# Altium PCB VECTOR_routed.PcbDoc (part 1 of 3)
Units mil, origin at the board's own origin, x right, y up, seen from the top; angles counter-clockwise.
Board outline 6000 x 4000 mil, 8 copper layers (Top Layer, Signal Layer 1, Signal Layer 2, Signal Layer 3, Signal Layer 4, VCC, Ground, Bottom Layer), stack 66.302 mil thick; 137 components, 274 nets, 1120 pads, 645 vias.
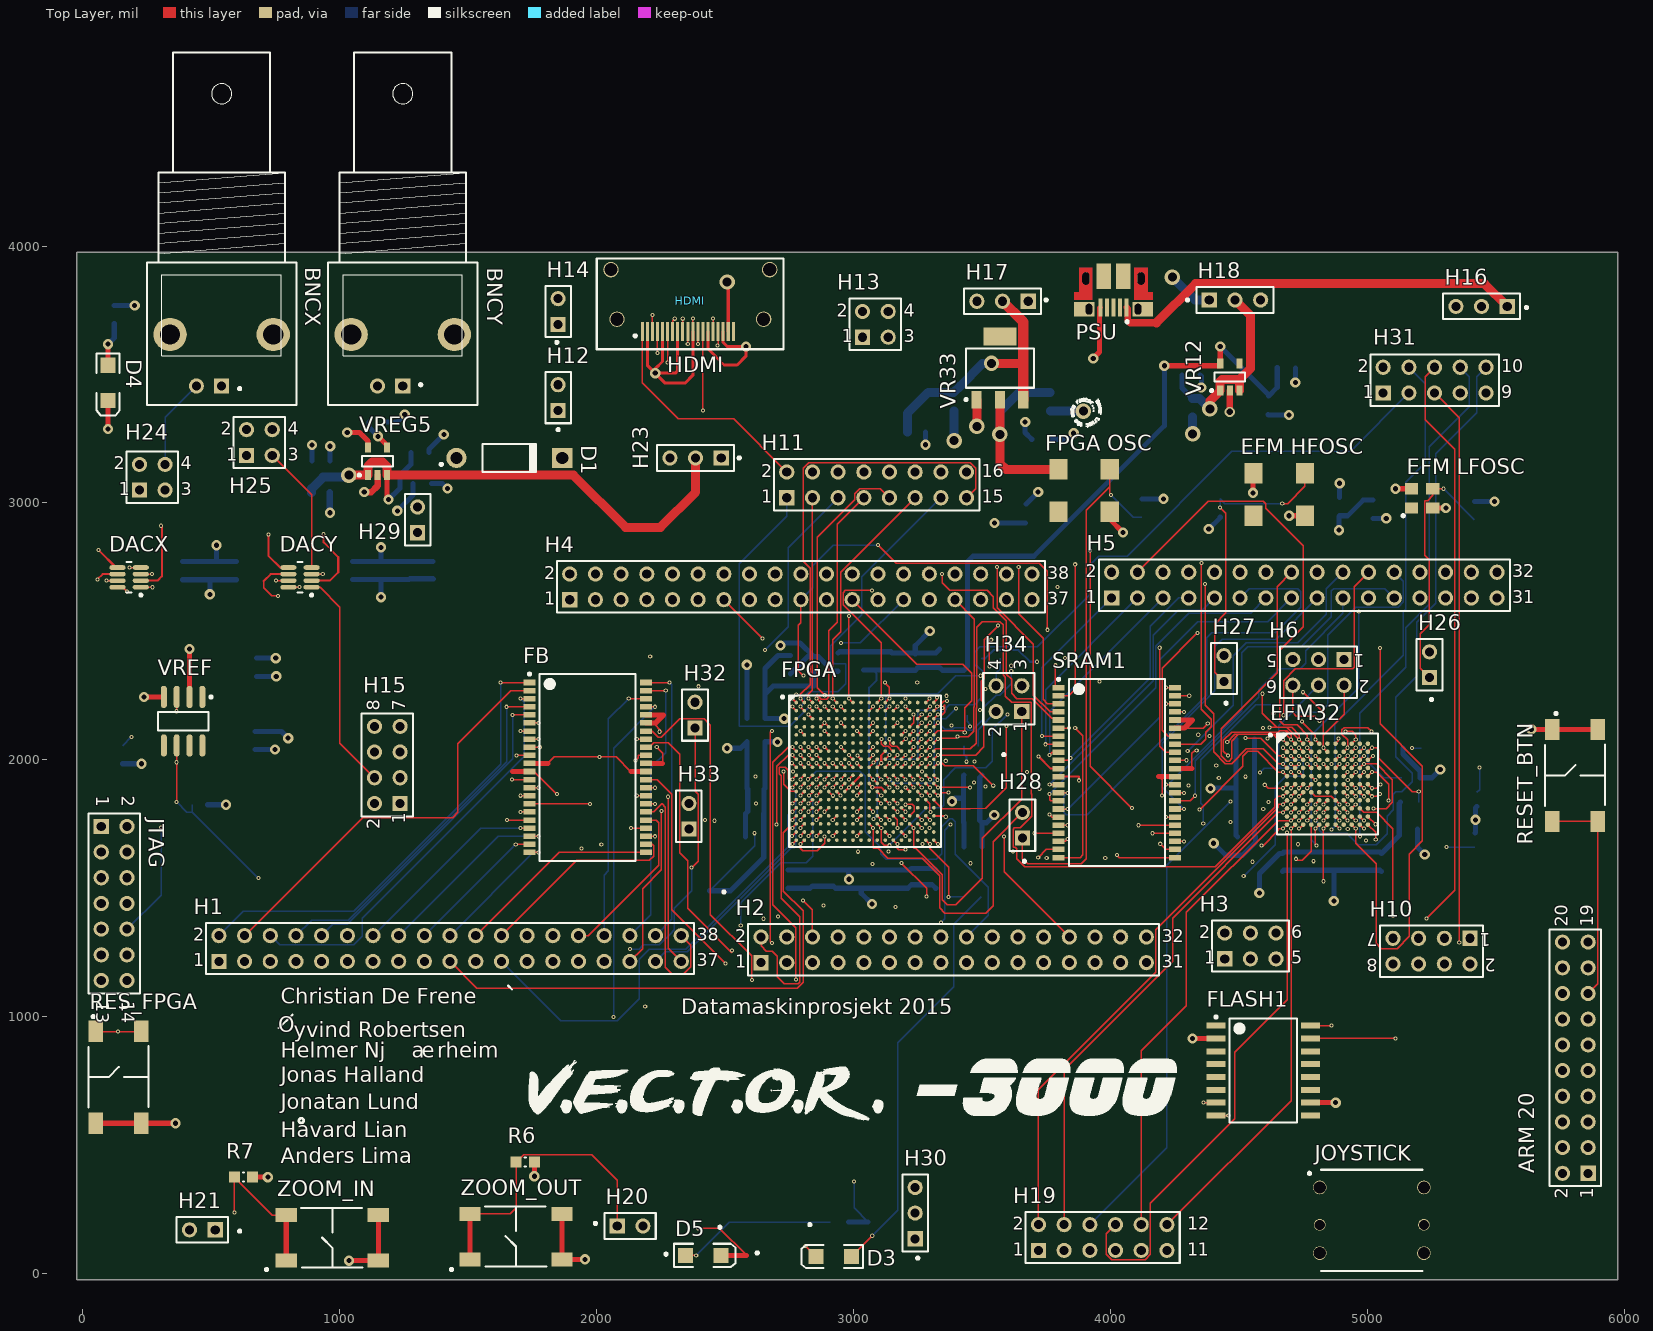
[diagram p0: Top Layer view]
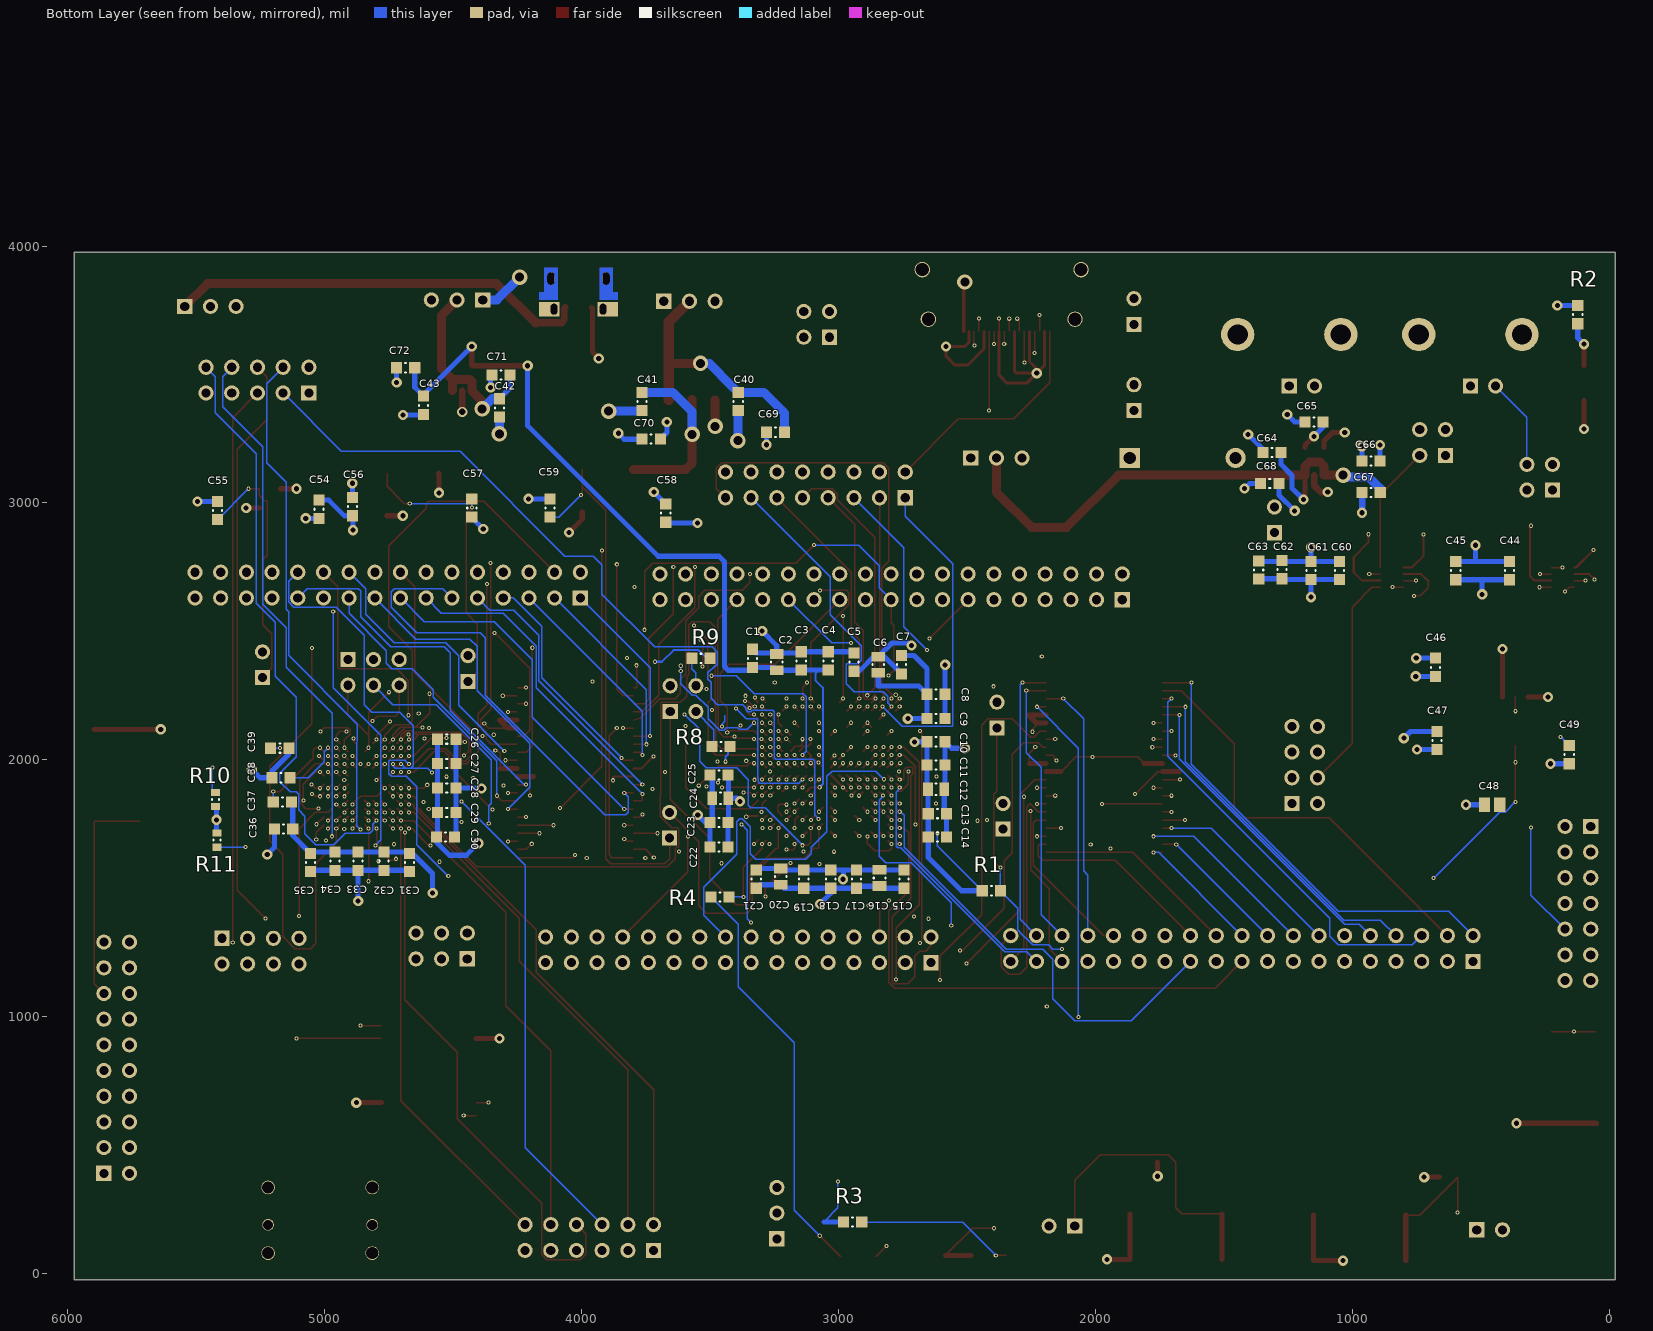
[diagram p1: Bottom Layer view, seen from below]
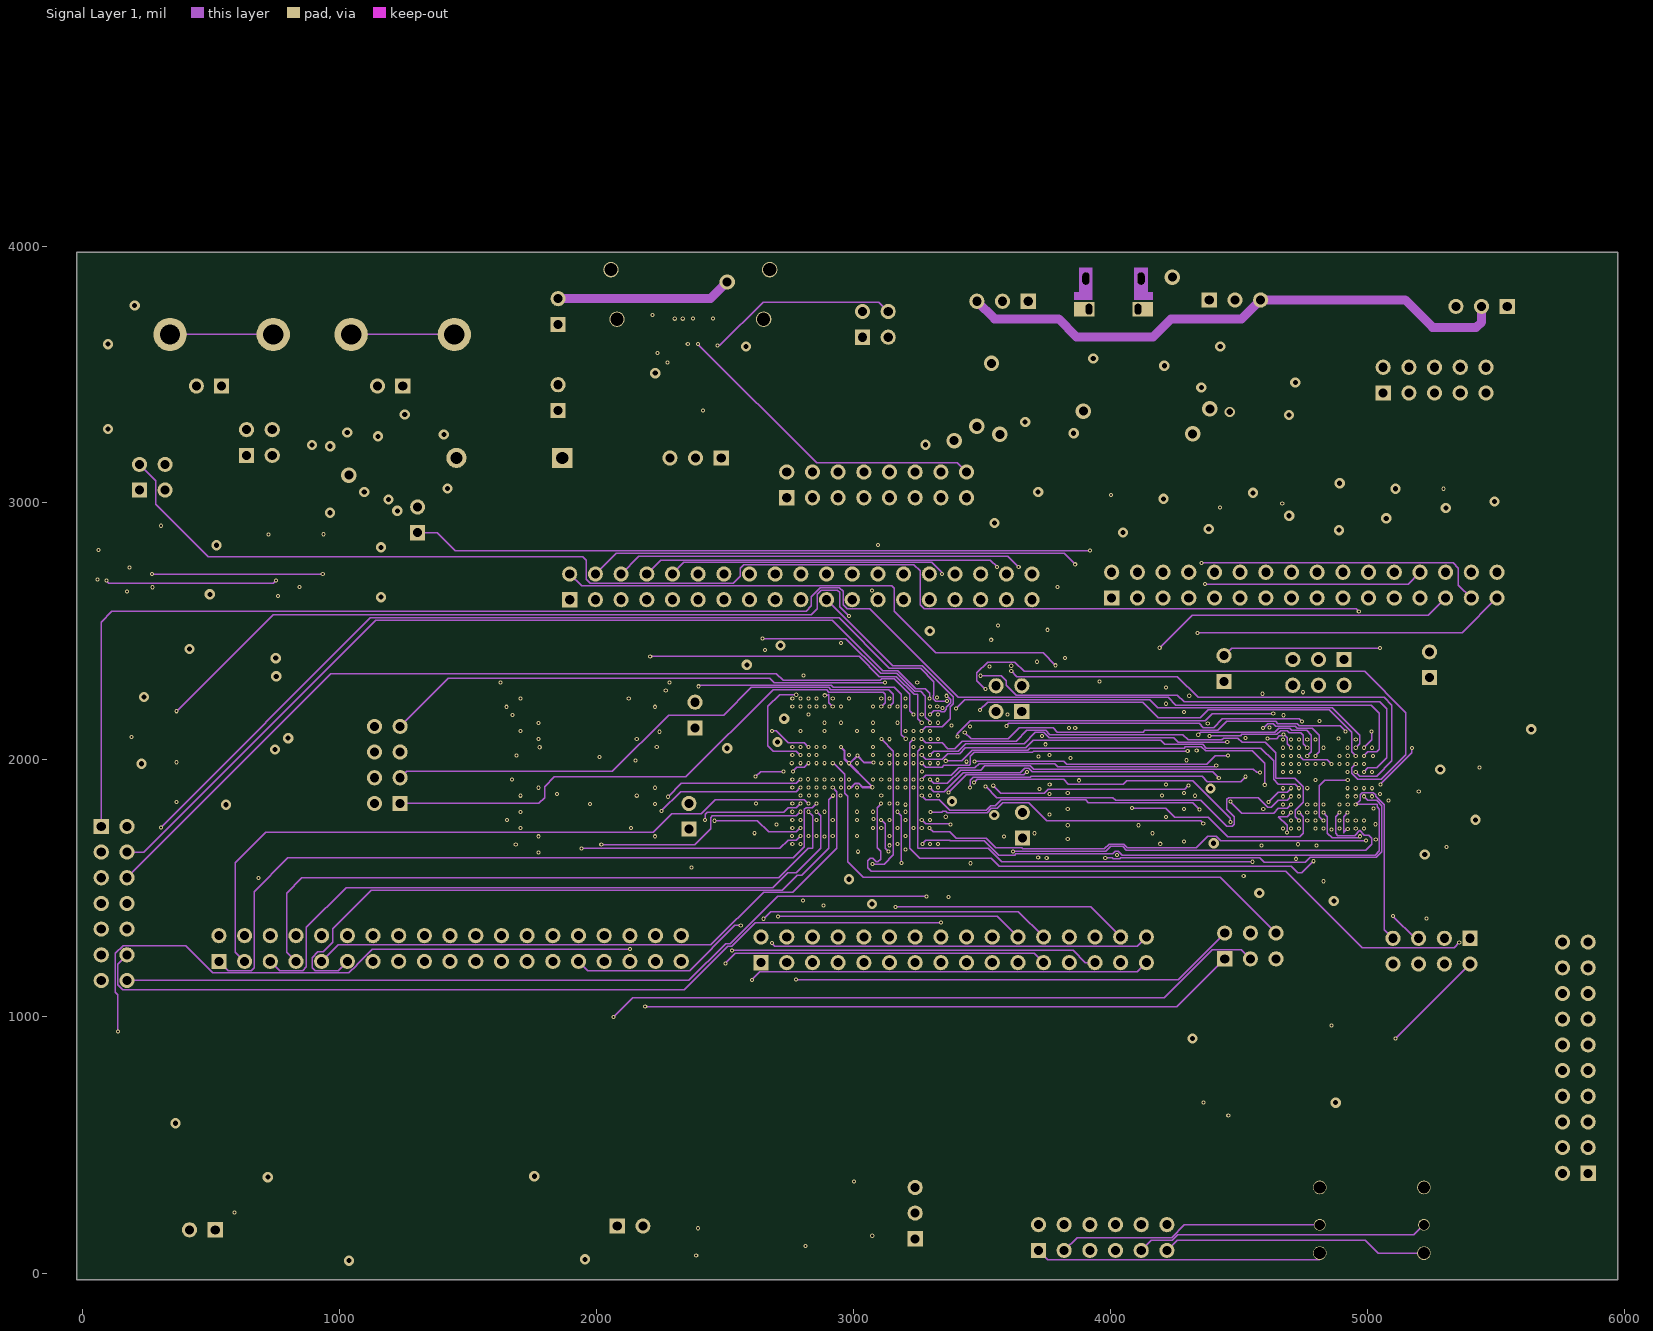
[diagram p2: Signal Layer 1]
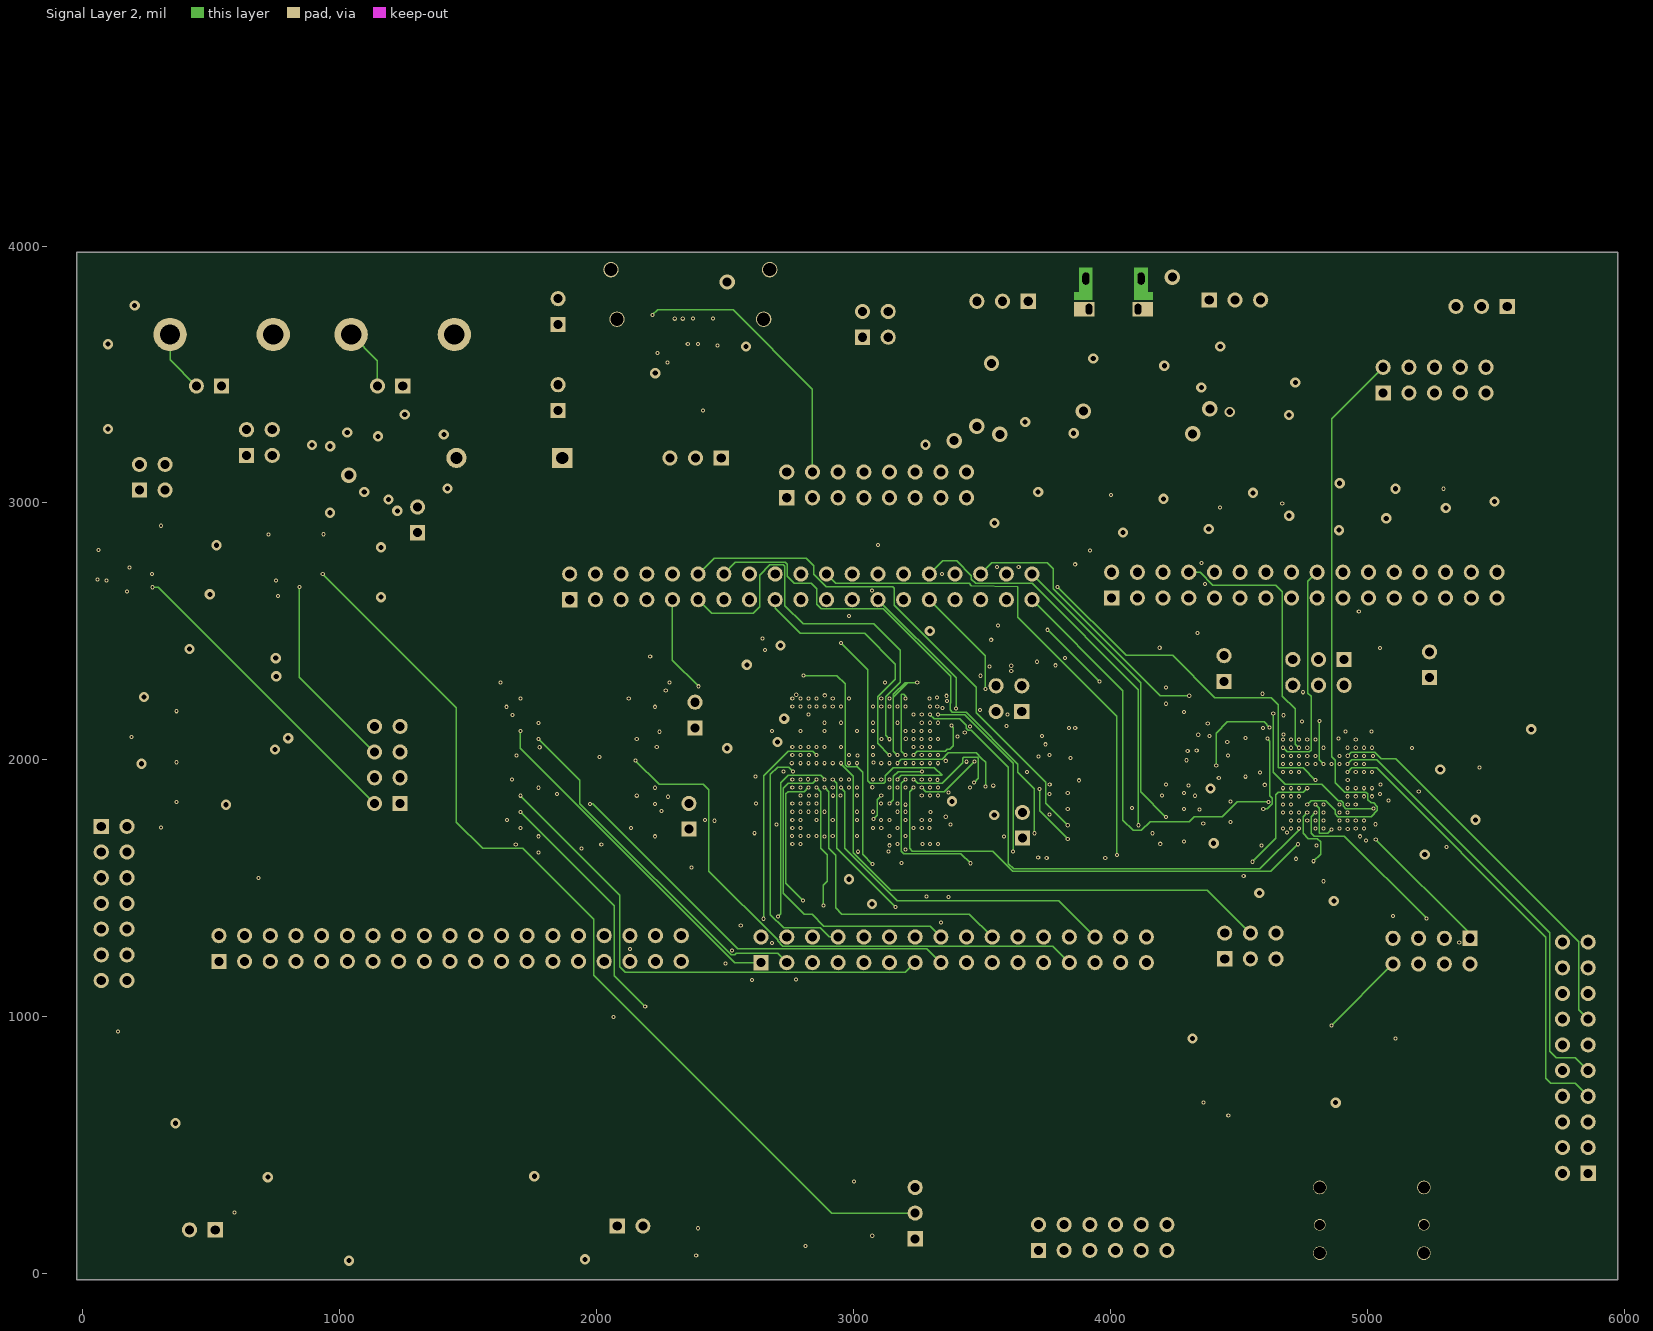
[diagram p3: Signal Layer 2]
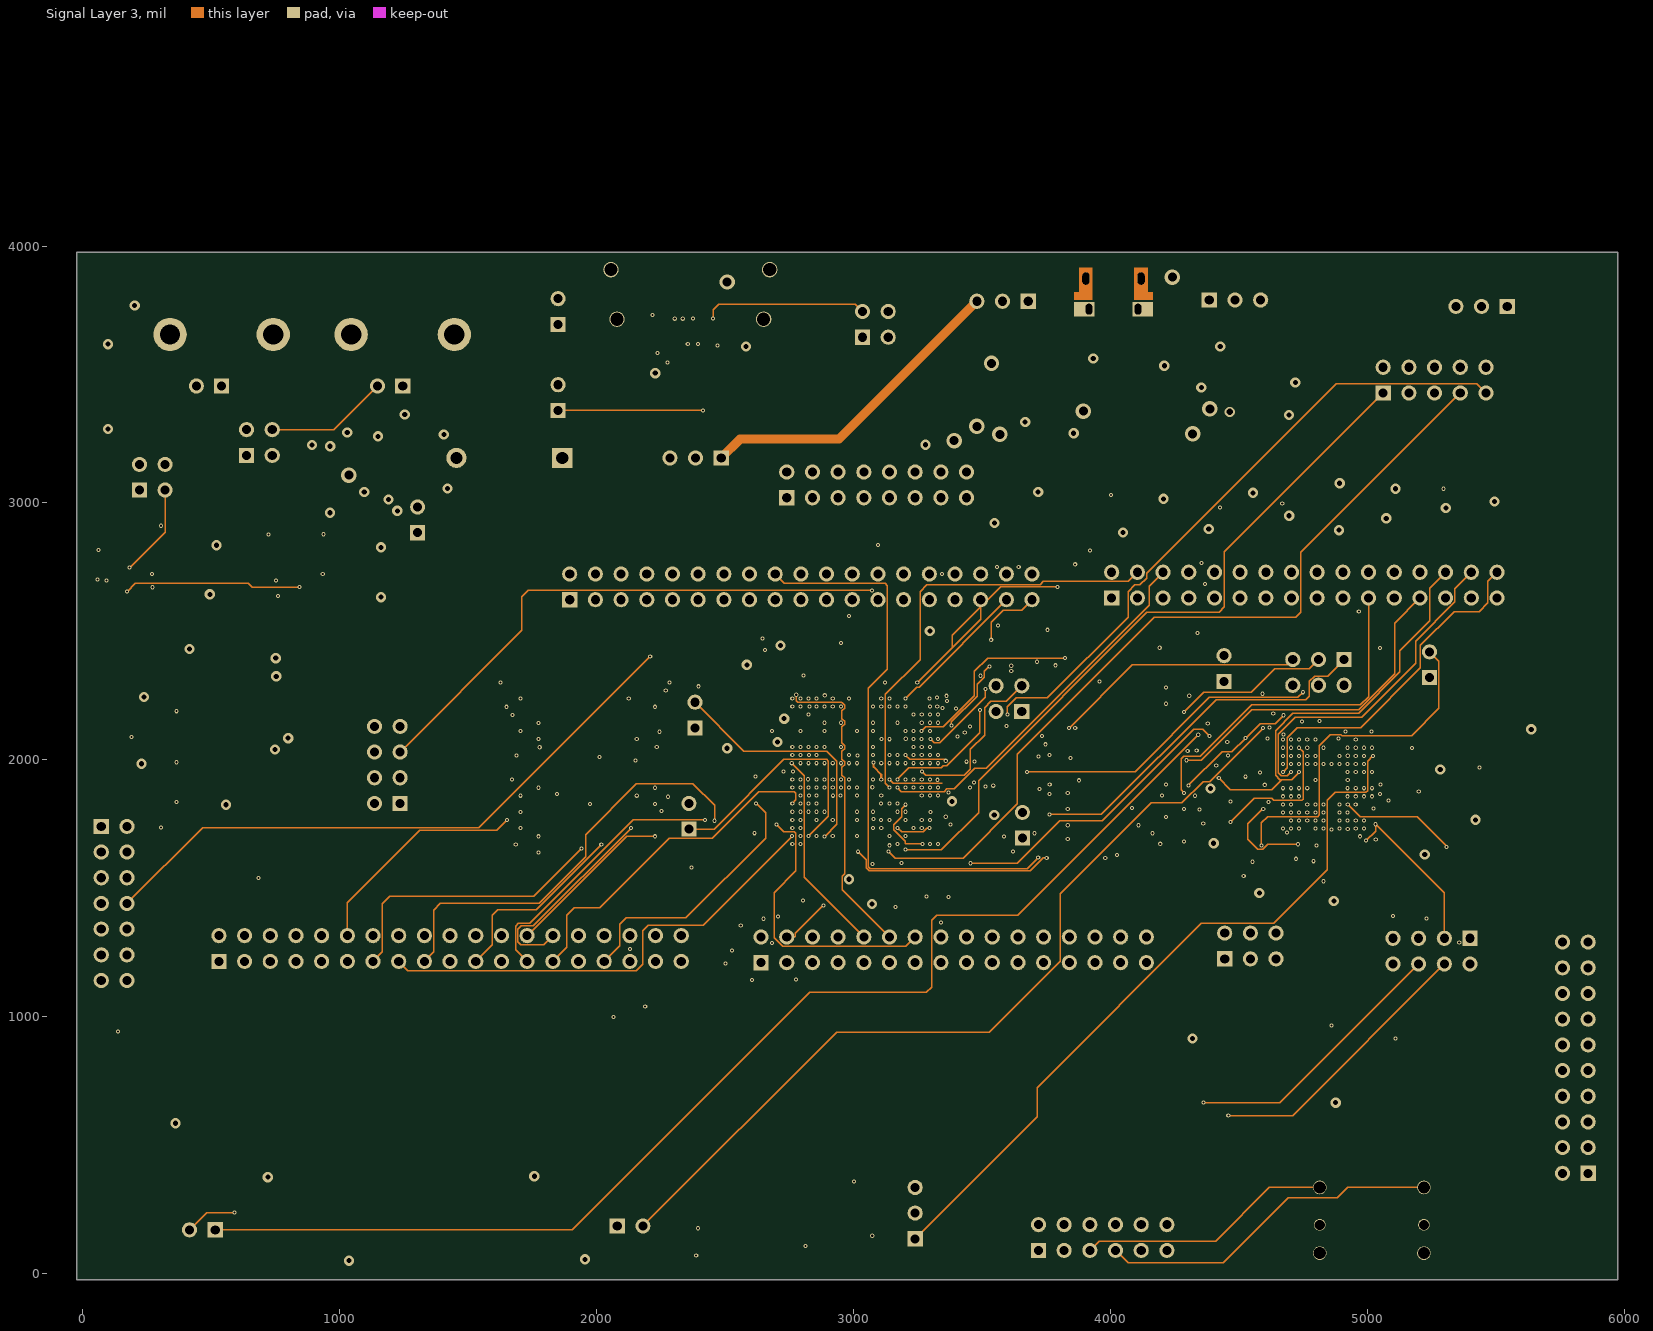
[diagram p4: Signal Layer 3]
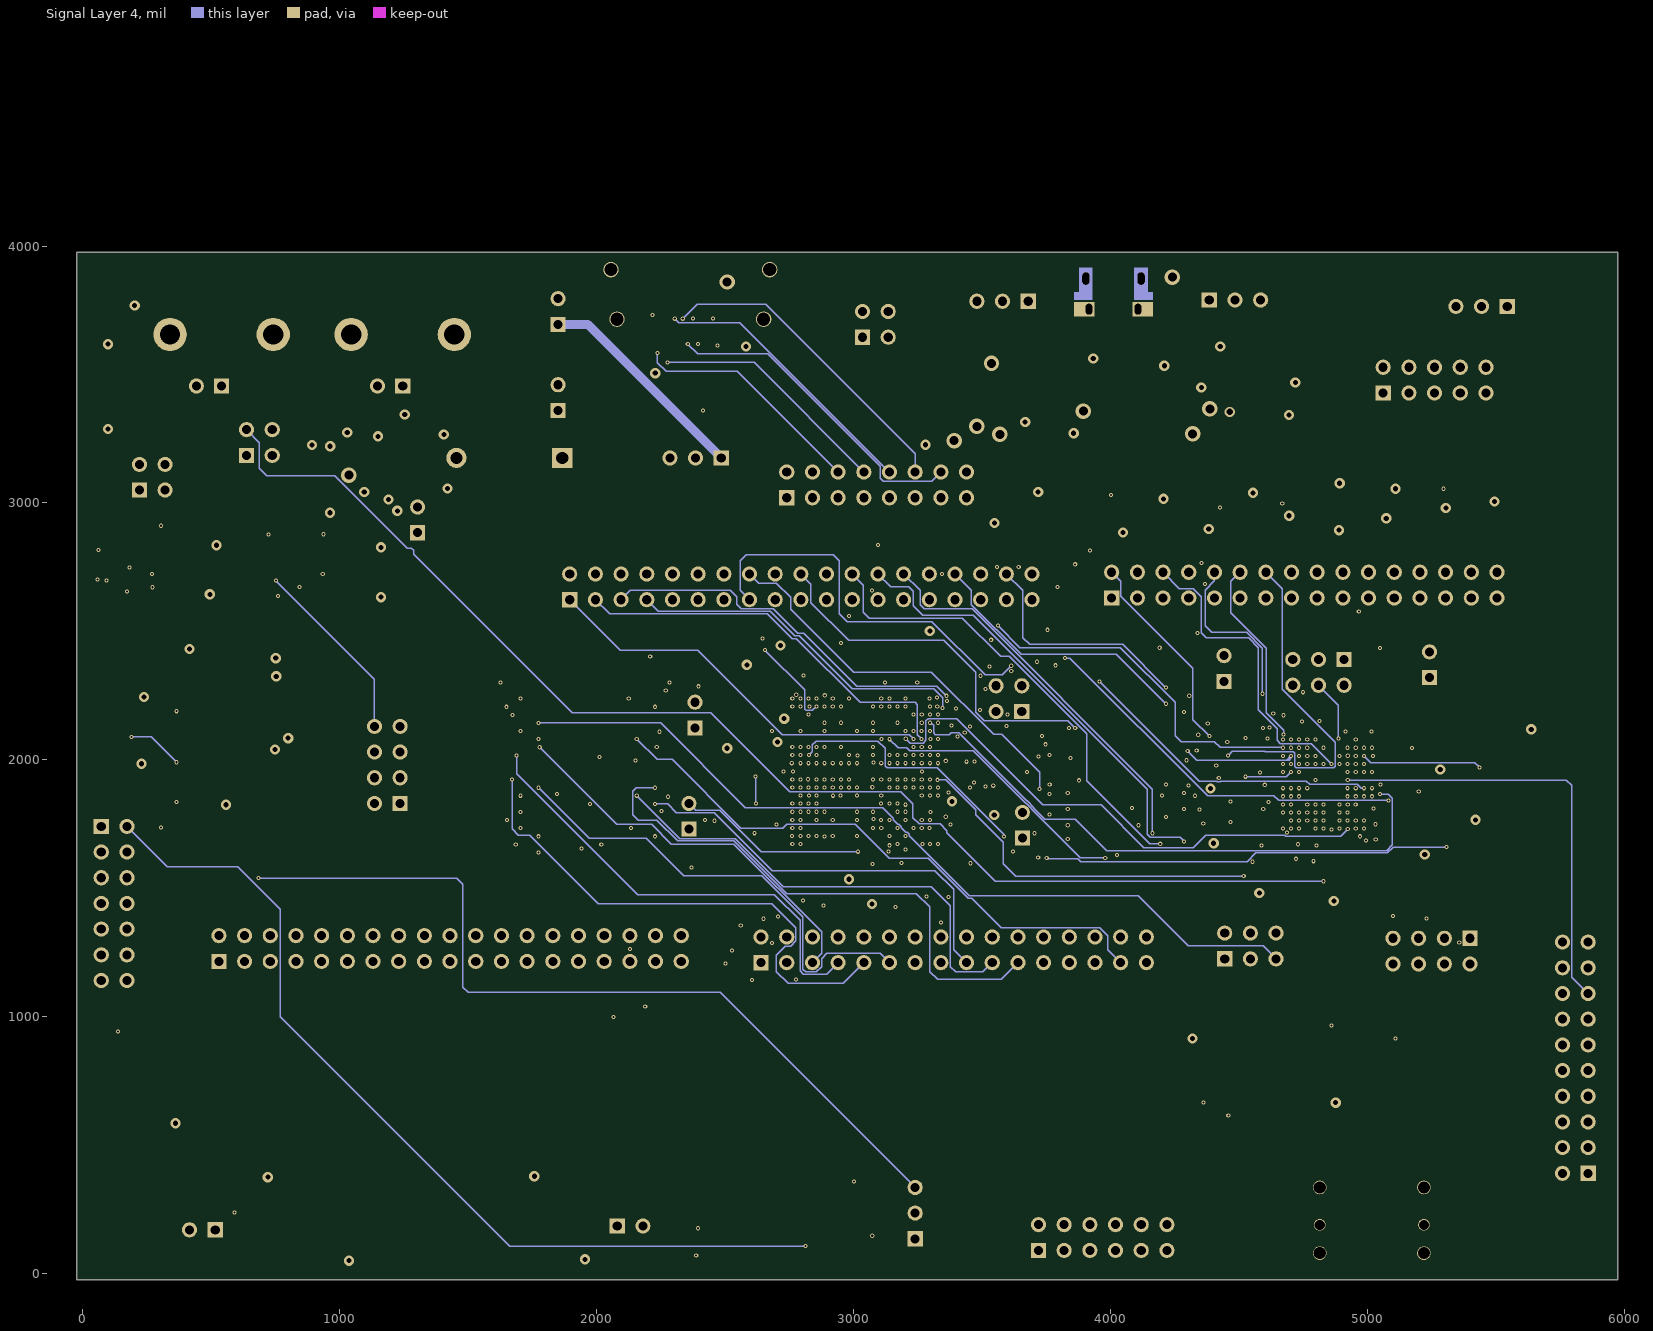
[diagram p5: Signal Layer 4]
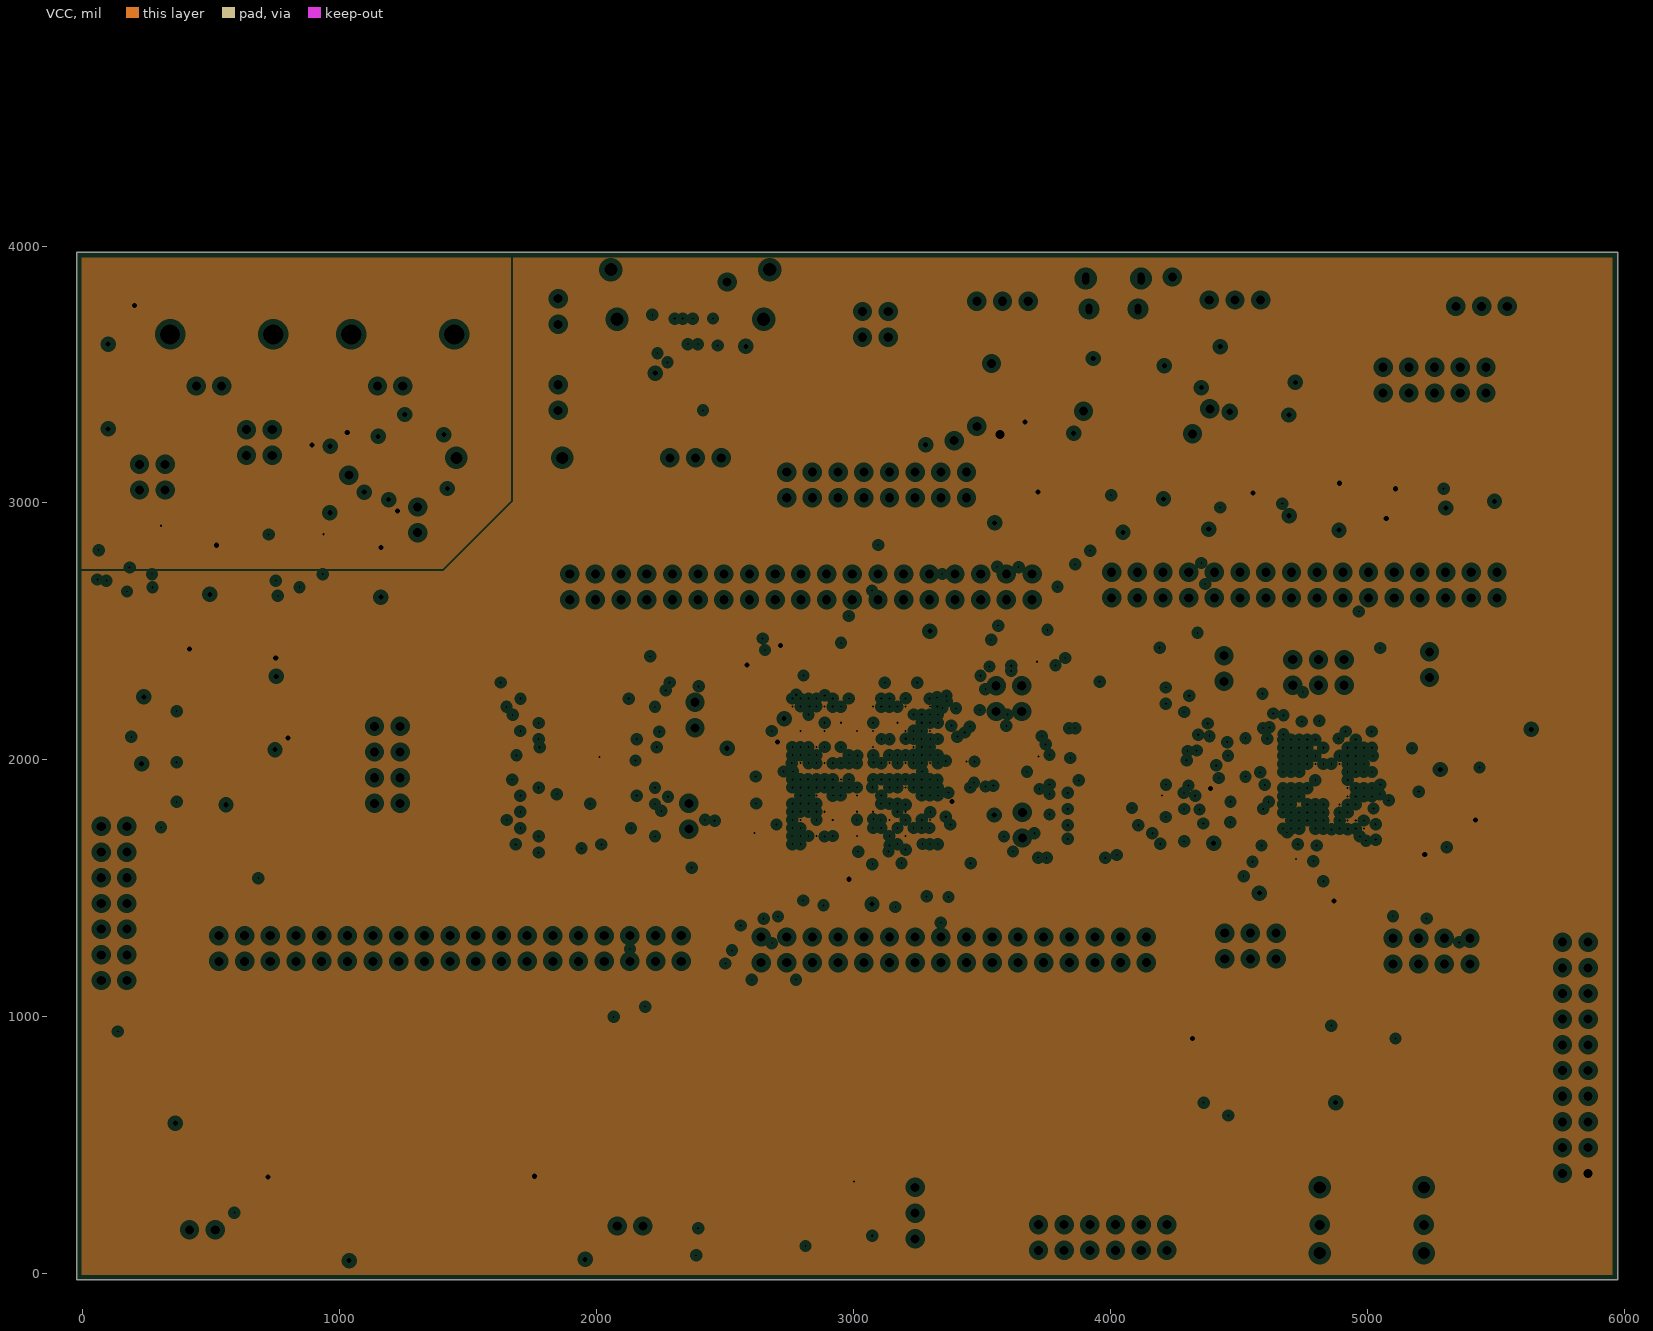
[diagram p6: VCC, clearances drawn from the general rule]
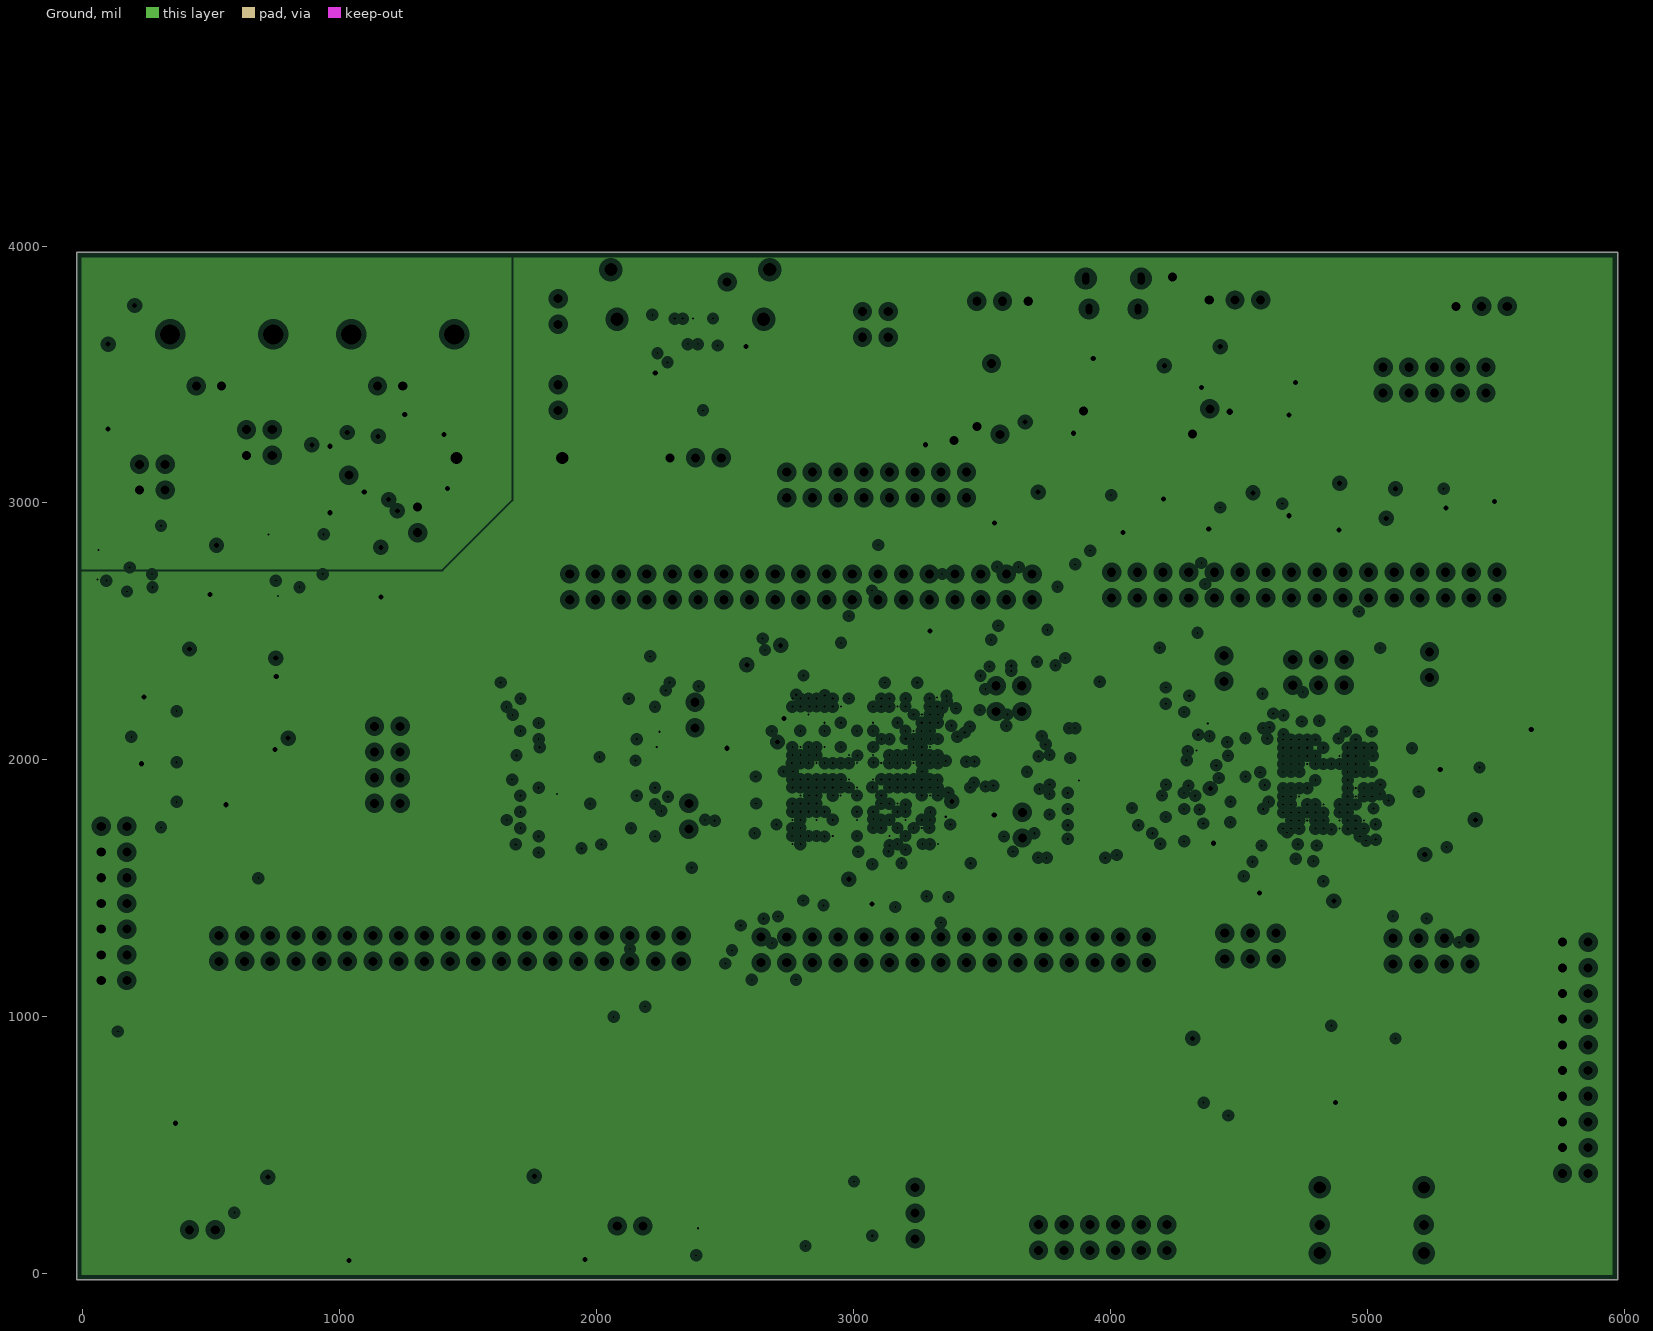
[diagram p7: Ground, clearances drawn from the general rule]

## Layer stack, top to bottom
Top Solder: solder mask 0.4, Solder Resist, Dk 3.5
Top Layer: signal copper 1.4
Dielectric 1: core 10, FR-4, Dk 4.2
Signal Layer 1: signal copper 1.417
Dielectric 5: prepreg 5, Dk 4.2
Signal Layer 2: signal copper 1.417
Dielectric 4: core 10, Dk 4.2
Signal Layer 3: signal copper 1.417
Dielectric 7: prepreg 5, Dk 4.2
Signal Layer 4: signal copper 1.417
Dielectric 8: core 10, Dk 4.2
VCC: plane copper 1.417, net (Multiple Nets)
Dielectric 3: prepreg 5, Dk 4.2
Ground: plane copper 1.417, net (Multiple Nets)
Dielectric 2: core 10, Dk 4.2
Bottom Layer: signal copper 1.4
Bottom Solder: solder mask 0.4, Solder Resist, Dk 3.5

## Board outline
-25,-25 5975,-25 5975,3975 2980,3975 -25,3975

## Design rules (kind name [scope] priority, off if disabled: settings)
Clearance [All] p1: gap=3.94
FanoutControl Fanout_BGA [(InComponentClass('EFM') OR InComponent('FPGA'))] p1: bgadir=Out bgaviamode=Centered fanoutstyle=Auto fanoutdirection=Alternating viagrid=1 // Fanout_BGA (Default Rule)
MinimumSolderMaskSliver [All] p1: minsoldermaskwidth=3.94
PlaneClearance [All] p1: clearance=20
PlaneConnect [All] p1: planeconnectstyle=Direct reliefexpansion=20 reliefentries=4 reliefconductorwidth=10 reliefairgap=10
PolygonConnect [All] p1: connectstyle=Relief reliefconductorwidth=10 reliefentries=4 polygonreliefangle="90 Angle" airgapwidth=10
RoutingVias [All] p1: holewidth=8 width=16 viastyle="Through Hole" minholewidth=6 minwidth=10 maxholewidth=100 maxwidth=100
SolderMaskExpansion [All] p1: expansion=5
Width Width_Power [InNetClass('Power')] p1: maxlimit=35 minlimit=8 preferedwidth=10
Width [All] p2: maxlimit=100 minlimit=5 preferedwidth=5
26 further rules are at their usual default settings.

## Classes and differential pairs
component class SRAM: H4 H5 H6 SRAM1
component class "Power Supply": C40 C41 C42 C43 C64 C65 C66 C67 C68 C69 C70 C71 C72 D4 D5 H16 H17 H18 H23 PSU R2 R3 VR12 VR33 VREG5
component class JoystickButtons: H19 H20 H21 JOYSTICK R6 R7 ZOOM_IN ZOOM_OUT
component class HDMI: H11 H12 H13 H14 HDMI
component class "Frame Buffer": FB H1 H2 H3
component class "FPGA Config": D3 H32 JTAG R1 R4 RES_FPGA
component class "FPGA Bank 0": FPGA
component class FPGA_VCC: C1 C2 C3 C4 C5 C6 C7 C8 C9 C10 C11 C12 C13 C14 C15 C16 C17 C18 C19 C20 C21 C22 C23 C24 C25
component class Flash: FLASH1 H10
component class EFM: "ARM 20" C39 EFM32 H29 R10 R11 RESET_BTN
component class "EFM Power": C26 C27 C28 C29 C30 C31 C32 C33 C34 C35 C36 C37 C38
component class DAC: BNCX BNCY C44 C45 C46 C47 C48 C49 C60 C61 C62 C63 D1 DACX DACY H15 H24 H25 H30 VREF
component class Clocks: C54 C55 C56 C57 C58 C59 "EFM HFOSC" "EFM LFOSC" "FPGA OSC" H26 H27 H28
net class EBI.A[0..22]: EBI.A0 EBI.A1 EBI.A2 EBI.A3 EBI.A4 EBI.A5 EBI.A6 EBI.A7 EBI.A8 EBI.A9 EBI.A10 EBI.A11 EBI.A12 EBI.A13 EBI.A14 EBI.A15 EBI.A16 EBI.A17 EBI.A18 EBI.A19 EBI.A20 EBI.A21 EBI.A22
net class EBI.D[0..15]: EBI.D0 EBI.D1 EBI.D2 EBI.D3 EBI.D4 EBI.D5 EBI.D6 EBI.D7 EBI.D8 EBI.D9 EBI.D10 EBI.D11 EBI.D12 EBI.D13 EBI.D14 EBI.D15
net class FB.A[0..18]: FB.A0 FB.A1 FB.A2 FB.A3 FB.A4 FB.A5 FB.A6 FB.A7 FB.A8 FB.A9 FB.A10 FB.A11 FB.A12 FB.A13 FB.A14 FB.A15 FB.A16 FB.A17 FB.A18
net class FB.D[0..15]: FB.D0 FB.D1 FB.D2 FB.D3 FB.D4 FB.D5 FB.D6 FB.D7 FB.D8 FB.D9 FB.D10 FB.D11 FB.D12 FB.D13 FB.D14 FB.D15
component class "FPGA Bank 2": H31 H33 H34 R8 R9

## Components (designator, comment, footprint, x,y, rotation, side; value= is the part's Value field where it differs from the comment)
"ARM 20" "ARM 20 Pin Header" HDR2X10 5860,390 r90 top
BNCX "BNC" "BNC_RA CON" 540,3455 r270 top
BNCY "BNC" "BNC_RA CON" 1245,3455 r270 top
C1 "4.7uF" CAPC0603(1608)100_M 3335,2395 r270 bottom
C2 "100uF" CAPC0805(2012)75_L 3240,2380 r270 bottom
C3 "470nF" CAPC0603(1608)100_M 3145,2385 r270 bottom
C4 "470nF" CAPC0603(1608)100_M 3040,2385 r270 bottom
C5 "4.7uF" CAPC0603(1608)100_M 2940,2380 r270 bottom
C6 "100uF" CAPC0805(2012)75_L 2845,2370 r90 bottom
C7 "470nF" CAPC0603(1608)100_M 2755,2370 r270 bottom
C8 "470nF" CAPC0603(1608)100_M 2620,2255 r180 bottom
C9 "470nF" CAPC0603(1608)100_M 2620,2160 r180 bottom
C10 "470nF" CAPC0603(1608)100_M 2620,2070 r0 bottom
C11 "470nF" CAPC0603(1608)100_M 2620,1980 r0 bottom
C12 "100uF" CAPC0805(2012)75_L 2620,1885 r0 bottom
C13 "4.7uF" CAPC0603(1608)100_M 2615,1790 r0 bottom
C14 "470nF" CAPC0603(1608)100_M 2615,1700 r0 bottom
C15 "470nF" CAPC0603(1608)100_M 2745,1535 r90 bottom
C16 "100uF" CAPC0805(2012)75_L 2840,1540 r90 bottom
C17 "4.7uF" CAPC0603(1608)100_M 2930,1535 r90 bottom
C18 "470nF" CAPC0603(1608)100_M 3030,1535 r90 bottom
C19 "470nF" CAPC0603(1608)100_M 3135,1535 r90 bottom
C20 "100uF" CAPC0805(2012)75_L 3225,1545 r90 bottom
C21 "4.7uF" CAPC0603(1608)100_M 3320,1535 r90 bottom
C22 "470nF" CAPC0603(1608)100_M 3465,1660 r180 bottom
C23 "470nF" CAPC0603(1608)100_M 3465,1755 r180 bottom
C24 "100uF" CAPC0805(2012)75_L 3460,1850 r180 bottom
C25 "4.7uF" CAPC0603(1608)100_M 3465,1940 r180 bottom
C26 "100nF" CAPC0603(1608)100_M 4525,2080 r180 bottom
C27 "100nF" CAPC0603(1608)100_M 4525,1985 r180 bottom
C28 "100nF" CAPC0603(1608)100_M 4525,1890 r180 bottom
C29 "100nF" CAPC0603(1608)100_M 4525,1795 r180 bottom
C30 "100nF" CAPC0603(1608)100_M 4530,1700 r180 bottom
C31 "100nF" CAPC0603(1608)100_M 4670,1600 r270 bottom
C32 "100nF" CAPC0603(1608)100_M 4770,1605 r90 bottom
C33 "10uF" CAPC0603(1608)100_M 4870,1605 r90 bottom
C34 "100nF" CAPC0603(1608)100_M 4960,1605 r90 bottom
C35 "100nF" CAPC0603(1608)100_M 5055,1600 r90 bottom
C36 "100nF" CAPC0603(1608)100_M 5160,1730 r180 bottom
C37 "1uF" CAPC0603(1608)100_M 5165,1835 r180 bottom
C38 "4.7uF" CAPC0603(1608)100_M 5170,1930 r180 bottom
C39 "1uF" CAPC0603(1608)100_M 5175,2045 r180 bottom
C40 "1uF" CAPC0603(1608)100_M 3390,3395 r90 bottom
C41 "1uF" CAPC0603(1608)100_M 3765,3395 r90 bottom
C42 "1uF" CAPC0603(1608)100_M 4320,3370 r90 bottom
C43 "1uF" CAPC0603(1608)100_M 4615,3380 r90 bottom
C44 "1uF" CAPC0603(1608)100_M 387,2736 r270 bottom
C45 "1uF" CAPC0603(1608)100_M 597,2736 r270 bottom
C46 "10uF" CAPC0603(1608)100_M 675,2360 r90 bottom
C47 "100nF" CAPC0603(1608)100_M 670,2075 r90 bottom
C48 "1uF" C0805 455,1825 r0 bottom
C49 "100nF" CAPC0603(1608)100_M 155,2020 r90 bottom
C54 "10nF" CAPC0603(1608)100_M 5022.42,2975.16 r270 bottom
C55 "15pF" CAPC0603(1608)100_M 5417.42,2970.16 r270 bottom
C56 "10nF" CAPC0603(1608)100_M 4892.42,2985.16 r90 bottom
C57 "15pF" CAPC0603(1608)100_M 4427.42,2980.16 r90 bottom
C58 "10nF" CAPC0603(1608)100_M 3672.42,2960.16 r90 bottom
C59 "15pF" CAPC0603(1608)100_M 4122.42,2980.16 r270 bottom
C60 "100nF" CAPC0603(1608)100_M 1049,2737 r90 bottom
C61 "10pF" CAPC0603(1608)100_M 1160,2737 r90 bottom
C62 "100nF" CAPC0603(1608)100_M 1273,2740 r270 bottom
C63 "10pF" CAPC0603(1608)100_M 1364,2739 r270 bottom
C64 "1uF" CAPC0603(1608)100_M 1312,3196 r180 bottom
C65 "4.7uF" CAPC0603(1608)100_M 1149,3315 r180 bottom
C66 "4.7uF" CAPC0603(1608)100_M 927,3163 r180 bottom
C67 "100nF" CAPC0603(1608)100_M 926,3041 r180 bottom
C68 "100nF" CAPC0603(1608)100_M 1321,3076 r180 bottom
C69 "100nF" CAPC0603(1608)100_M 3245,3275 r180 bottom
C70 "100nF" CAPC0603(1608)100_M 3729,3248 r180 bottom
C71 "100nF" CAPC0603(1608)100_M 4314,3498 r180 bottom
C72 "100nF" CAPC0603(1608)100_M 4685,3526 r180 bottom
D1 "Diode 1N4001" DO-41 1660,3175 r0 top
D3 "LED2" 3.2X1.6X1.1 2923,66 r180 top
D4 "LED2" 3.2X1.6X1.1 98,3467 r270 top
D5 "LED2" 3.2X1.6X1.1 2415.16,70.47 r0 top
DACX "AD5061BRJZ-1500RL7" RJ-8_N 180,2710 r180 top
DACY "AD5061BRJZ-1500RL7" RJ-8_N 845,2710 r180 top
EFM32 "EFM32GG990F1024-BGA112" ENMR-BGA112 4845,1905 r0 top
"EFM HFOSC" "FXO-HC736R-48" FPGA-OSC 4522.42,2910.16 r90 top
"EFM LFOSC" "F32K-327" LFOSC-32 5172.42,2980.16 r90 top
FB "CY7C1051DV33-10ZSXI" TSOP-44-SRAM 1965,1970 r0 top
FLASH1 "S25FL129P0XMFI001" SOIC-16-FLASH 4595,790 r0 top
FPGA "XC6SLX45-2CSG324I" CSG324 3045,1955 r0 top
"FPGA OSC" "FXO-HC736R-100" FPGA-OSC 3762.42,2925.16 r90 top
H1 "FB_ADDRESS_HEADER" HDR2X19 529.33,1215.16 r0 top
H2 "FB_DATA_HEADER" HDR2X16 2640,1210 r0 top
H3 "FB_CONTROL_HEADER" HDR2X3 4445,1225 r0 top
H4 "SRAM1_ADDRESS_HEADER" HDR2X19 1895.08,2623.03 r0 top
H5 "SRAM1_DATA_HEADER" HDR2X16 4005,2630 r0 top
H6 "SRAM1_CONTROL_HEADER" HDR2X3 4910,2390 r180 top
H10 "Header 4X2" HDR2X4 5400,1305 r180 top
H11 "HDMI_HEADER" HDR2X8 2740,3020 r0 top
H12 "CEC_HEADER" HDR1X2 1850,3360 r90 top
H13 "DDC_HEADER" HDR2X2 3035,3645 r0 top
H14 "POWER_HEADER" HDR1X2 1850,3695 r90 top
H15 "DAC_HEADER" HDR2X4 1235,1830 r90 top
H16 "5V_HEADER" HDR1X3 5545,3765 r180 top
H17 "3.3V_HEADER" HDR1X3 3680,3785 r180 top
H18 "1.2V_HEADER" HDR1X3 4385,3790 r0 top
H19 "JOYSTICK_HEADER" HDR2X6 3720,90 r0 top
H20 "ZOOM_OUT_HEADER" HDR1X2 2080,185 r0 top
H21 "ZOOM_IN_HEADER" HDR1X2 515,170 r180 top
H23 "5V_DAC_HEADER" HDR1X3 2485,3175 r180 top
H24 "Header 2X2" HDR2X2 220,3050 r0 top
H25 "Header 2X2" HDR2X2 637,3185 r0 top
H26 "Header 2" HDR1X2 5242.42,2320.16 r90 top
H27 "Header 2" HDR1X2 4442.42,2305.16 r90 top
H28 "Header 2" HDR1X2 3657.42,1695.16 r90 top
H29 "Header 2" HDR1X2 1303,2884 r90 top
H30 "Header 3" HDR1X3 3240,135 r90 top
H31 "Header 5X2" HDR2X5 5062,3428 r0 top
H32 "Header 2" HDR1X2 2383,2124 r90 top
H33 "Header 2" HDR1X2 2359,1730 r90 top
H34 "Header 2X2" HDR2X2 3655,2188 r90 top
HDMI "HDMI_connector" HDMI-type-A 2650,3715 r180 top
JOYSTICK "SKQUCAA010" 5-WAY-JOYSTICK 4815,335 r0 top
JTAG "Header 7X2" HDR2X7 71.26,1740.55 r270 top
PSU "MICRO-USB_CONNECTOR" MICRO-USB 4012,3761 r180 top
R1 "4.7kOhm" RESC0603(1608)_M 2405,1490 r0 bottom
R2 "39Ohm" RESC0603(1608)_M 122,3733 r90 bottom
R3 "18 Ohm" RESC0603(1608)_M 2945,200 r0 bottom
R4 "68 Ohm" RESC0603(1608)_M 3461,1466 r180 bottom
R6 "10 kOhm" RESC0603(1608)_M 1722,434 r0 top
R7 "10 kOhm" RESC0603(1608)_M 625,375 r0 top
R8 "10 kOhm" RESC0603(1608)_M 3457,2052 r180 bottom
R9 "10 kOhm" RESC0603(1608)_M 3535,2395 r180 bottom
R10 "330 Ohm" RESC0603(1608)_L 5426,1845 r90 bottom
R11 "4.7 kOhm" RESC0603(1608)_L 5419,1687 r90 bottom
RES_FPGA "FSM2JSMA" Button 50,585 r0 top
RESET_BTN "FSM2JSMA" Button 5720,1760 r0 top
SRAM1 "CY7C1051DV33-10ZSXI" TSOP-44-SRAM 4025,1950 r0 top
VR12 "ADP170AUJZ-1.2-r7" VREG-1.2 4465,3490 r90 top
VR33 "ADP3339AKCZ-3.3-r7" VREG-3.3 3570,3525 r90 top
VREF "REF195GSZ-REEL7" ADI-R-8_N 390,2150 r270 top
VREG5 "LP2992AIM5-5.0/NOPB" VREG-5 1147,3162 r90 top
ZOOM_IN "FSM2JSMA" Button 1150,50 r90 top
ZOOM_OUT "FSM2JSMA" Button 1865,55 r90 top

## Footprints (in the part's own frame and the unit in brackets; to place one, negate y for a bottom-side part, rotate by r counter-clockwise, add the part's x,y. Pads: shape width x height; smd on the part's side, far side on the other; paste and mask are expansions set on the pad)
3.2X1.6X1.1 [mm] "SMT LED; 2 Flat Leads"
  rect 1.5x1.5 smd: 1(-1.75,0) 2(1.75,0)
  silkscreen extent -2.9,-1.15 3.2,1.15
5-WAY-JOYSTICK [mm]
  oval 1.34x1.35 hole 1.2: 1(0,0) 3(0,-6.5) 4(10.3,-6.5) 6(10.3,0)
  round 1.15 hole 1: 2(0,-3.7) 5(10.3,-3.7)
  silkscreen extent 0.15,-8.25 10.15,1.75
ADI-R-8_N [mm] "SOIC, 8-Leads, Body 4.9x3.9mm, Pitch 1.27mm, IPC Medium Density"
  oval 2.2x0.6 smd: 1(-2.4,1.905) 2(-2.4,0.635) 3(-2.4,-0.635) 4(-2.4,-1.905) 5(2.4,-1.905) 6(2.4,-0.635) 7(2.4,0.635) 8(2.4,1.905)
  silkscreen extent -2.52,-2.5 0.9,2.88, body extent -2,-2.5 2,2.5, height 1.75
"BNC_RA CON" [mm] "Connector; BNC Elbow"
  rect 1.5x1.5 hole 0.9: 1(0,0)
  round 3.3 hole 2: 2(-5.1,5.1) 2(-5.1,-5.1)
  round 1.5 hole 0.9: 2(0,-2.5)
  silkscreen extent -33,-7.4 1.9,7.4
Button [mm] "copied from 256 SoG"
  rect 1.4x2.1 smd: 1(0,9.1) 2(0,0) 3(4.5,9.1) 4(4.5,0)
  silkscreen extent -0.7,1.55 5.21,7.62
C0805 [mm] "Chip Capacitor, Body 2.0x1.3mm, IPC High Density"
  rect 1.1x1.4 smd: 1(-0.75,0) 2(0.75,0)
  body extent -1.1,-0.72 1.1,0.72, height 1.4
CAPC0603(1608)100_M [mm] "Chip Capacitor, Body 1.6x0.8mm, Height 1.0mm, IPC Low Density"
  rect 1.1x1.1 smd: 1(-0.9,0) 2(0.9,0)
  silkscreen extent -0.05,-0.45 0.05,0.45, body extent -0.87,-0.47 0.88,0.48, height 1
CAPC0805(2012)75_L [mm] "Chip Capacitor, Body 2.0x1.2mm, Height 0.75mm, IPC High Density"
  rect 0.95x1.35 smd: 1(-0.8,0) 2(0.8,0)
  silkscreen extent -0.05,-0.58 0.05,0.58, body extent -1.1,-0.72 1.1,0.72, height 0.75
CSG324 [mm] "BGA, 324-Leads, Body 15x15mm, Pitch 0.8mm"
  round 0.36 smd: A1(-6.8,6.8) A2(-6,6.8) A3(-5.2,6.8) A4(-4.4,6.8) A5(-3.6,6.8) A6(-2.8,6.8) A7(-2,6.8) A8(-1.2,6.8) A9(-0.4,6.8) A10(0.4,6.8) A11(1.2,6.8) A12(2,6.8) A13(2.8,6.8) A14(3.6,6.8) A15(4.4,6.8) A16(5.2,6.8) A17(6,6.8) A18(6.8,6.8) B1(-6.8,6) B2(-6,6) B3(-5.2,6) B4(-4.4,6) B5(-3.6,6) B6(-2.8,6) B7(-2,6) B8(-1.2,6) B9(-0.4,6) B10(0.4,6) B11(1.2,6) B12(2,6) B13(2.8,6) B14(3.6,6) B15(4.4,6) B16(5.2,6) B17(6,6) B18(6.8,6) C1(-6.8,5.2) C2(-6,5.2) C3(-5.2,5.2) C4(-4.4,5.2) C5(-3.6,5.2) C6(-2.8,5.2) C7(-2,5.2) C8(-1.2,5.2) C9(-0.4,5.2) C10(0.4,5.2) C11(1.2,5.2) C12(2,5.2) C13(2.8,5.2) C14(3.6,5.2) C15(4.4,5.2) C16(5.2,5.2) C17(6,5.2) C18(6.8,5.2) D1(-6.8,4.4) D2(-6,4.4) D3(-5.2,4.4) D4(-4.4,4.4) D5(-3.6,4.4) D6(-2.8,4.4) D7(-2,4.4) D8(-1.2,4.4) D9(-0.4,4.4) D10(0.4,4.4) D11(1.2,4.4) D12(2,4.4) D13(2.8,4.4) D14(3.6,4.4) D15(4.4,4.4) D16(5.2,4.4) D17(6,4.4) D18(6.8,4.4) E1(-6.8,3.6) E2(-6,3.6) E3(-5.2,3.6) E4(-4.4,3.6) E5(-3.6,3.6) E6(-2.8,3.6) E7(-2,3.6) E8(-1.2,3.6) E9(-0.4,3.6) E10(0.4,3.6) E11(1.2,3.6) E12(2,3.6) E13(2.8,3.6) E14(3.6,3.6) E15(4.4,3.6) E16(5.2,3.6) E17(6,3.6) E18(6.8,3.6) F1(-6.8,2.8) F2(-6,2.8) F3(-5.2,2.8) F4(-4.4,2.8) F5(-3.6,2.8) F6(-2.8,2.8) F7(-2,2.8) F8(-1.2,2.8) F9(-0.4,2.8) F10(0.4,2.8) F11(1.2,2.8) F12(2,2.8) F13(2.8,2.8) F14(3.6,2.8) F15(4.4,2.8) F16(5.2,2.8) F17(6,2.8) F18(6.8,2.8) G1(-6.8,2) G2(-6,2) G3(-5.2,2) G4(-4.4,2) G5(-3.6,2) G6(-2.8,2) G7(-2,2) G8(-1.2,2) G9(-0.4,2) G10(0.4,2) G11(1.2,2) G12(2,2) G13(2.8,2) G14(3.6,2) G15(4.4,2) G16(5.2,2) G17(6,2) G18(6.8,2) H1(-6.8,1.2) H2(-6,1.2) H3(-5.2,1.2) H4(-4.4,1.2) H5(-3.6,1.2) H6(-2.8,1.2) H7(-2,1.2) H8(-1.2,1.2) H9(-0.4,1.2) H10(0.4,1.2) H11(1.2,1.2) H12(2,1.2) H13(2.8,1.2) H14(3.6,1.2) H15(4.4,1.2) H16(5.2,1.2) H17(6,1.2) H18(6.8,1.2) J1(-6.8,0.4) J2(-6,0.4) J3(-5.2,0.4) J4(-4.4,0.4) J5(-3.6,0.4) J6(-2.8,0.4) J7(-2,0.4) J8(-1.2,0.4) J9(-0.4,0.4) J10(0.4,0.4) J11(1.2,0.4) J12(2,0.4) J13(2.8,0.4) J14(3.6,0.4) J15(4.4,0.4) J16(5.2,0.4) J17(6,0.4) J18(6.8,0.4) K1(-6.8,-0.4) K2(-6,-0.4) K3(-5.2,-0.4) K4(-4.4,-0.4) K5(-3.6,-0.4) K6(-2.8,-0.4) K7(-2,-0.4) K8(-1.2,-0.4) K9(-0.4,-0.4) K10(0.4,-0.4) K11(1.2,-0.4) K12(2,-0.4) K13(2.8,-0.4) K14(3.6,-0.4) K15(4.4,-0.4) K16(5.2,-0.4) K17(6,-0.4) K18(6.8,-0.4) L1(-6.8,-1.2) L2(-6,-1.2) L3(-5.2,-1.2) L4(-4.4,-1.2) L5(-3.6,-1.2) L6(-2.8,-1.2) L7(-2,-1.2) L8(-1.2,-1.2) L9(-0.4,-1.2) L10(0.4,-1.2) L11(1.2,-1.2) L12(2,-1.2) L13(2.8,-1.2) L14(3.6,-1.2) L15(4.4,-1.2) L16(5.2,-1.2) L17(6,-1.2) L18(6.8,-1.2) M1(-6.8,-2) M2(-6,-2) M3(-5.2,-2) M4(-4.4,-2) M5(-3.6,-2) M6(-2.8,-2) M7(-2,-2) M8(-1.2,-2) M9(-0.4,-2) M10(0.4,-2) M11(1.2,-2) M12(2,-2) M13(2.8,-2) M14(3.6,-2) M15(4.4,-2) M16(5.2,-2) M17(6,-2) M18(6.8,-2) N1(-6.8,-2.8) N2(-6,-2.8) N3(-5.2,-2.8) N4(-4.4,-2.8) N5(-3.6,-2.8) N6(-2.8,-2.8) N7(-2,-2.8) N8(-1.2,-2.8) N9(-0.4,-2.8) N10(0.4,-2.8) N11(1.2,-2.8) N12(2,-2.8) N13(2.8,-2.8) N14(3.6,-2.8) N15(4.4,-2.8) N16(5.2,-2.8) N17(6,-2.8) N18(6.8,-2.8) P1(-6.8,-3.6) P2(-6,-3.6) P3(-5.2,-3.6) P4(-4.4,-3.6) P5(-3.6,-3.6) P6(-2.8,-3.6) P7(-2,-3.6) P8(-1.2,-3.6) P9(-0.4,-3.6) P10(0.4,-3.6) P11(1.2,-3.6) P12(2,-3.6) P13(2.8,-3.6) P14(3.6,-3.6) P15(4.4,-3.6) P16(5.2,-3.6) P17(6,-3.6) P18(6.8,-3.6) R1(-6.8,-4.4) R2(-6,-4.4) R3(-5.2,-4.4) R4(-4.4,-4.4) R5(-3.6,-4.4) R6(-2.8,-4.4) R7(-2,-4.4) R8(-1.2,-4.4) R9(-0.4,-4.4) R10(0.4,-4.4) R11(1.2,-4.4) R12(2,-4.4) R13(2.8,-4.4) R14(3.6,-4.4) R15(4.4,-4.4) R16(5.2,-4.4) R17(6,-4.4) R18(6.8,-4.4) T1(-6.8,-5.2) T2(-6,-5.2) T3(-5.2,-5.2) T4(-4.4,-5.2) T5(-3.6,-5.2) T6(-2.8,-5.2) T7(-2,-5.2) T8(-1.2,-5.2) T9(-0.4,-5.2) T10(0.4,-5.2) T11(1.2,-5.2) T12(2,-5.2) T13(2.8,-5.2) T14(3.6,-5.2) T15(4.4,-5.2) T16(5.2,-5.2) T17(6,-5.2) T18(6.8,-5.2) U1(-6.8,-6) U2(-6,-6) U3(-5.2,-6) U4(-4.4,-6) U5(-3.6,-6) U6(-2.8,-6) U7(-2,-6) U8(-1.2,-6) U9(-0.4,-6) U10(0.4,-6) U11(1.2,-6) U12(2,-6) U13(2.8,-6) U14(3.6,-6) U15(4.4,-6) U16(5.2,-6) U17(6,-6) U18(6.8,-6) V1(-6.8,-6.8) V2(-6,-6.8) V3(-5.2,-6.8) V4(-4.4,-6.8) V5(-3.6,-6.8) V6(-2.8,-6.8) V7(-2,-6.8) V8(-1.2,-6.8) V9(-0.4,-6.8) V10(0.4,-6.8) V11(1.2,-6.8) V12(2,-6.8) V13(2.8,-6.8) V14(3.6,-6.8) V15(4.4,-6.8) V16(5.2,-6.8) V17(6,-6.8) V18(6.8,-6.8)
  silkscreen extent -8.27,-7.5 7.5,7.5, body extent -7.5,-7.5 7.5,7.5, height 1.5
DO-41 [mm] "Diode, Axial; Body 5.2 x 2.7 mm (LxDia. max), Lead Dia. 0.86 mm (max)"
  round 2 hole 1.2: 1(-5.23,0)
  rect 2x2 hole 1.2: 2(5.23,0)
  silkscreen extent -2.65,-1.4 2.75,1.4
ENMR-BGA112 [mm] "BGA, 112-Balls, Body 10x10mm, Pitch 0.8mm"
  round 0.45 smd: A1(-4,4) A2(-3.2,4) A3(-2.4,4) A4(-1.6,4) A5(-0.8,4) A6(0,4) A7(0.8,4) A8(1.6,4) A9(2.4,4) A10(3.2,4) A11(4,4) B1(-4,3.2) B2(-3.2,3.2) B3(-2.4,3.2) B4(-1.6,3.2) B5(-0.8,3.2) B6(0,3.2) B7(0.8,3.2) B8(1.6,3.2) B9(2.4,3.2) B10(3.2,3.2) B11(4,3.2) C1(-4,2.4) C2(-3.2,2.4) C3(-2.4,2.4) C4(-1.6,2.4) C5(-0.8,2.4) C6(0,2.4) C7(0.8,2.4) C8(1.6,2.4) C9(2.4,2.4) C10(3.2,2.4) C11(4,2.4) D1(-4,1.6) D2(-3.2,1.6) D3(-2.4,1.6) D4(-1.6,1.6) D5(-0.8,1.6) D6(0,1.6) D7(0.8,1.6) D8(1.6,1.6) D9(2.4,1.6) D10(3.2,1.6) D11(4,1.6) E1(-4,0.8) E2(-3.2,0.8) E3(-2.4,0.8) E4(-1.6,0.8) E5(-0.8,0.8) E6(0,0.8) E7(0.8,0.8) E8(1.6,0.8) E9(2.4,0.8) E10(3.2,0.8) E11(4,0.8) F1(-4,0) F2(-3.2,0) F3(-2.4,0) F4(-1.6,0) F5(-0.8,0) F6(0,0) F7(0.8,0) F8(1.6,0) F9(2.4,0) F10(3.2,0) F11(4,0) G1(-4,-0.8) G2(-3.2,-0.8) G3(-2.4,-0.8) G4(-1.6,-0.8) G5(-0.8,-0.8) G6(0,-0.8) G7(0.8,-0.8) G8(1.6,-0.8) G9(2.4,-0.8) G10(3.2,-0.8) G11(4,-0.8) H1(-4,-1.6) H2(-3.2,-1.6) H3(-2.4,-1.6) H4(-1.6,-1.6) H5(-0.8,-1.6) H6(0,-1.6) H7(0.8,-1.6) H8(1.6,-1.6) H9(2.4,-1.6) H10(3.2,-1.6) H11(4,-1.6) J1(-4,-2.4) J2(-3.2,-2.4) J3(-2.4,-2.4) J4(-1.6,-2.4) J5(-0.8,-2.4) J6(0,-2.4) J7(0.8,-2.4) J8(1.6,-2.4) J9(2.4,-2.4) J10(3.2,-2.4) J11(4,-2.4) K1(-4,-3.2) K2(-3.2,-3.2) K3(-2.4,-3.2) K4(-1.6,-3.2) K5(-0.8,-3.2) K6(0,-3.2) K7(0.8,-3.2) K8(1.6,-3.2) K9(2.4,-3.2) K10(3.2,-3.2) K11(4,-3.2) L1(-4,-4) L2(-3.2,-4) L3(-2.4,-4) L4(-1.6,-4) L5(-0.8,-4) L6(0,-4) L7(0.8,-4) L8(1.6,-4) L9(2.4,-4) L10(3.2,-4) L11(4,-4)
  silkscreen extent -5.77,-5 5,5, body extent -5,-5 5,5, height 1.3
FPGA-OSC [mm]
  rect 2x1.8 smd: 1(1.016,-0.889) 2(1.016,-5.969) 3(5.216,-5.969) 4(5.216,-0.889)
  round 0.3 on Top Overlay: 3(-0.381,0.508)
HDMI-type-A [mm]
  rect 0.3x1.9 smd: 1(12,1.2) 2(11.5,1.2) 3(11,1.2) 4(10.5,1.2) 5(10,1.2) 6(9.5,1.2) 7(9,1.2) 8(8.5,1.2) 9(8,1.2) 10(7.5,1.2) 11(7,1.2) 12(6.5,1.2) 13(6,1.2) 14(5.5,1.2) 15(5,1.2) 16(4.5,1.2) 17(4,1.2) 18(3.5,1.2) 19(3,1.2)
  round 1.524 hole 1.3: ""(-0.6,-4.9) ""(0,0) ""(14.5,0) ""(15.1,-4.9)
  silkscreen extent -1.95,-6.01 16.52,2.97
HDR1X2 [mm] "Connector; Header; 2 Position"
  rect 1.5x1.5 hole 0.9: 1(0,0)
  round 1.5 hole 0.9: 2(2.54,0)
  silkscreen extent -1.27,-1.27 3.81,1.27
HDR1X3 [mm] "Connector; Header; 3 Position"
  rect 1.5x1.5 hole 0.9: 1(0,0)
  round 1.5 hole 0.9: 2(2.54,0) 3(5.08,0)
  silkscreen extent -1.27,-1.27 6.35,1.27
HDR2X2 [mm] "Connector; Header; 2x2 Position"
  rect 1.5x1.5 hole 0.9: 1(0,0)
  round 1.5 hole 0.9: 2(0,2.54) 3(2.54,0) 4(2.54,2.54)
  silkscreen extent -1.27,-1.27 3.81,3.81
HDR2X3 [mm] "Connector; Header; 3x2 Position"
  rect 1.5x1.5 hole 0.9: 1(0,0)
  round 1.5 hole 0.9: 2(0,2.54) 3(2.54,0) 4(2.54,2.54) 5(5.08,0) 6(5.08,2.54)
  silkscreen extent -1.27,-1.27 6.35,3.81
HDR2X4 [mm] "Connector; Header; 4x2 Position"
  rect 1.5x1.5 hole 0.9: 1(0,0)
  round 1.5 hole 0.9: 2(0,2.54) 3(2.54,0) 4(2.54,2.54) 5(5.08,0) 6(5.08,2.54) 7(7.62,0) 8(7.62,2.54)
  silkscreen extent -1.27,-1.27 8.89,3.81
HDR2X5 [mm] "Connector; Header; 5x2 Position"
  rect 1.5x1.5 hole 0.9: 1(0,0)
  round 1.5 hole 0.9: 2(0,2.54) 3(2.54,0) 4(2.54,2.54) 5(5.08,0) 6(5.08,2.54) 7(7.62,0) 8(7.62,2.54) 9(10.16,0) 10(10.16,2.54)
  silkscreen extent -1.27,-1.27 11.43,3.81
HDR2X6 [mm] "Connector; Header; 6x2 Position"
  rect 1.5x1.5 hole 0.9: 1(0,0)
  round 1.5 hole 0.9: 2(0,2.54) 3(2.54,0) 4(2.54,2.54) 5(5.08,0) 6(5.08,2.54) 7(7.62,0) 8(7.62,2.54) 9(10.16,0) 10(10.16,2.54) 11(12.7,0) 12(12.7,2.54)
  silkscreen extent -1.27,-1.27 13.97,3.81
HDR2X7 [mm] "Connector; Header; 7x2 Position"
  rect 1.5x1.5 hole 0.9: 1(0,0)
  round 1.5 hole 0.9: 2(0,2.54) 3(2.54,0) 4(2.54,2.54) 5(5.08,0) 6(5.08,2.54) 7(7.62,0) 8(7.62,2.54) 9(10.16,0) 10(10.16,2.54) 11(12.7,0) 12(12.7,2.54) 13(15.24,0) 14(15.24,2.54)
  silkscreen extent -1.27,-1.27 16.51,3.81
HDR2X8 [mm] "Connector; Header; 8x2 Position"
  rect 1.5x1.5 hole 0.9: 1(0,0)
  round 1.5 hole 0.9: 2(0,2.54) 3(2.54,0) 4(2.54,2.54) 5(5.08,0) 6(5.08,2.54) 7(7.62,0) 8(7.62,2.54) 9(10.16,0) 10(10.16,2.54) 11(12.7,0) 12(12.7,2.54) 13(15.24,0) 14(15.24,2.54) 15(17.78,0) 16(17.78,2.54)
  silkscreen extent -1.27,-1.27 19.05,3.81
HDR2X10 [mm] "Connector; Header; 10x2 Position"
  rect 1.5x1.5 hole 0.9: 1(0,0)
  round 1.5 hole 0.9: 2(0,2.54) 3(2.54,0) 4(2.54,2.54) 5(5.08,0) 6(5.08,2.54) 7(7.62,0) 8(7.62,2.54) 9(10.16,0) 10(10.16,2.54) 11(12.7,0) 12(12.7,2.54) 13(15.24,0) 14(15.24,2.54) 15(17.78,0) 16(17.78,2.54) 17(20.32,0) 18(20.32,2.54) 19(22.86,0) 20(22.86,2.54)
  silkscreen extent -1.27,-1.27 24.13,3.81
HDR2X16 [mm] "Connector; Header; 16x2 Position"
  rect 1.5x1.5 hole 0.9: 1(0,0)
  round 1.5 hole 0.9: 2(0,2.54) 3(2.54,0) 4(2.54,2.54) 5(5.08,0) 6(5.08,2.54) 7(7.62,0) 8(7.62,2.54) 9(10.16,0) 10(10.16,2.54) 11(12.7,0) 12(12.7,2.54) 13(15.24,0) 14(15.24,2.54) 15(17.78,0) 16(17.78,2.54) 17(20.32,0) 18(20.32,2.54) 19(22.86,0) 20(22.86,2.54) 21(25.4,0) 22(25.4,2.54) 23(27.94,0) 24(27.94,2.54) 25(30.48,0) 26(30.48,2.54) 27(33.02,0) 28(33.02,2.54) 29(35.56,0) 30(35.56,2.54) 31(38.1,0) 32(38.1,2.54)
  silkscreen extent -1.27,-1.27 39.37,3.81
HDR2X19 [mm] "Connector; Header; 19x2 Position"
  rect 1.5x1.5 hole 0.9: 1(0,0)
  round 1.5 hole 0.9: 2(0,2.54) 3(2.54,0) 4(2.54,2.54) 5(5.08,0) 6(5.08,2.54) 7(7.62,0) 8(7.62,2.54) 9(10.16,0) 10(10.16,2.54) 11(12.7,0) 12(12.7,2.54) 13(15.24,0) 14(15.24,2.54) 15(17.78,0) 16(17.78,2.54) 17(20.32,0) 18(20.32,2.54) 19(22.86,0) 20(22.86,2.54) 21(25.4,0) 22(25.4,2.54) 23(27.94,0) 24(27.94,2.54) 25(30.48,0) 26(30.48,2.54) 27(33.02,0) 28(33.02,2.54) 29(35.56,0) 30(35.56,2.54) 31(38.1,0) 32(38.1,2.54) 33(40.64,0) 34(40.64,2.54) 35(43.18,0) 36(43.18,2.54) 37(45.72,0) 38(45.72,2.54)
  silkscreen extent -1.27,-1.27 46.99,3.81
LFOSC-32 [mm]
  rect 1.1x1.3 smd: 1(0,0) 2(0,-2.1) 3(1.9,-2.1) 4(1.9,0)
MICRO-USB [mm]
  rect 0.4x1.75 smd: 1(-1.3,0) 2(-0.65,0) 3(0,0) 4(0.65,0) 5(1.3,0)
  oval 0.7x1.2 hole 0.7 slot 1.2 at 90 deg unplated: ""(-2.725,-2.855) ""(2.725,-2.855)
  rect 2x1.4 hole 0.65 slot 1.05 at 90 deg unplated copper offset -0.475,0: ""(-2.425,0.175)
  rect 1.425x2.5 smd: ""(-0.963,-3.075) ""(0.963,-3.075)
  rect 2x1.4 hole 0.65 slot 1.05 at 90 deg unplated copper offset 0.475,0: ""(2.425,0.175)
  Multi-Layer region: -3.9,-1.475 -3.375,-1.475 -3.375,-3.925 -2.075,-3.925 -2.075,-0.775 -3.9,-0.775
  Multi-Layer region: 3.9,-1.475 3.375,-1.475 3.375,-3.925 2.075,-3.925 2.075,-0.775 3.9,-0.775
RESC0603(1608)_L [mm] "Chip Resistor, Body 1.6x0.8mm, IPC High Density"
  rect 0.7x0.9 smd: 1(-0.7,0) 2(0.7,0)
  silkscreen extent -0.05,-0.35 0.05,0.35, body extent -0.85,-0.47 0.85,0.47, height 0.6
RESC0603(1608)_M [mm] "Chip Resistor, Body 1.6x0.8mm, IPC Low Density"
  rect 1.1x1.1 smd: 1(-0.9,0) 2(0.9,0)
  silkscreen extent -0.05,-0.45 0.05,0.45, body extent -0.85,-0.47 0.85,0.47, height 0.6
RJ-8_N [mm] "SOP, 8-Leads, Body 2.9x1.6mm, Pitch 0.65mm, IPC Medium Density"
  oval 1.6x0.45 smd: 1(-1.15,0.975) 2(-1.15,0.325) 3(-1.15,-0.325) 4(-1.15,-0.975) 5(1.15,-0.975) 6(1.15,-0.325) 7(1.15,0.325) 8(1.15,0.975)
  silkscreen extent -1.28,-1.5 0.25,1.87, body extent -0.85,-1.5 0.85,1.5, height 1.45
SOIC-16-FLASH [mm] "SOIC, 16-Leads, Body 10.30x7.50mm, Pitch 1.27mm, IPC Medium Density"
  rect 1.85x0.6 smd: 1(-4.675,4.445) 2(-4.675,3.175) 3(-4.675,1.905) 4(-4.675,0.635) 5(-4.675,-0.635) 6(-4.675,-1.905) 7(-4.675,-3.175) 8(-4.675,-4.445) 9(4.675,-4.445) 10(4.675,-3.175) 11(4.675,-1.905) 12(4.675,-0.635) 13(4.675,0.635) 14(4.675,1.905) 15(4.675,3.175) 16(4.675,4.445)
  silkscreen extent -4.8,-5.15 3.35,5.42, body extent -3.75,-5.15 3.75,5.15, height 2.65
TSOP-44-SRAM [mm] "TSOP, 44-Leads, Body 18.41x10.16mm, Pitch 0.80mm, IPC Medium Density"
  rect 1.2x0.55 smd: 1(-5.75,8.4) 2(-5.75,7.6) 3(-5.75,6.8) 4(-5.75,6) 5(-5.75,5.2) 6(-5.75,4.4) 7(-5.75,3.6) 8(-5.75,2.8) 9(-5.75,2) 10(-5.75,1.2) 11(-5.75,0.4) 12(-5.75,-0.4) 13(-5.75,-1.2) 14(-5.75,-2) 15(-5.75,-2.8) 16(-5.75,-3.6) 17(-5.75,-4.4) 18(-5.75,-5.2) 19(-5.75,-6) 20(-5.75,-6.8) 21(-5.75,-7.6) 22(-5.75,-8.4) 23(5.75,-8.4) 24(5.75,-7.6) 25(5.75,-6.8) 26(5.75,-6) 27(5.75,-5.2) 28(5.75,-4.4) 29(5.75,-3.6) 30(5.75,-2.8) 31(5.75,-2) 32(5.75,-1.2) 33(5.75,-0.4) 34(5.75,0.4) 35(5.75,1.2) 36(5.75,2) 37(5.75,2.8) 38(5.75,3.6) 39(5.75,4.4) 40(5.75,5.2) 41(5.75,6) 42(5.75,6.8) 43(5.75,7.6) 44(5.75,8.4)
  silkscreen extent -5.87,-9.25 4.75,9.35, body extent -5.15,-9.25 5.15,9.25, height 1.2
VREG-1.2 [mm] "SOT23, 5-Leads, Body 2.90x2.80mm, Pitch 0.95mm, IPC Medium Density"
  rect 1x0.6 smd: 1(-1.35,0.95) 2(-1.35,0) 3(-1.35,-0.95) 4(1.35,-0.95) 5(1.35,0.95)
  silkscreen extent -1.47,-1.5 0.45,1.92, body extent -0.85,-1.5 0.85,1.5, height 1
VREG-3.3 [mm] "SOT223, 4-Leads, Body 6.50x7.00mm (avg), Pitch 2.30mm, IPC Medium Density"
  rect 1.75x1 smd: 1(-3.125,2.3) 2(-3.125,0) 3(-3.125,-2.3)
  rect 1.75x3.25 smd: 4(3.125,0)
  silkscreen extent -3.25,-3.35 1.95,3.47, body extent -1.85,-3.35 1.85,3.35, height 1.8
VREG-5 [mm] "SOT23, 5-Leads, Body 2.90x2.80mm, Pitch 0.95mm, IPC Medium Density"
  rect 1x0.6 smd: 1(-1.375,0.95) 2(-1.375,0) 3(-1.375,-0.95) 4(1.375,-0.95) 5(1.375,0.95)
  silkscreen extent -1.5,-1.55 0.5,1.92, body extent -0.88,-1.52 0.87,1.53, height 1.45

## Part data
"ARM 20": library part "Header 10X2", "Header, 10-Pin, Dual row"
BNCX BNCY: "BNC Elbow Connector"
C1 C3 C4 C5 C7 C8 C9 C10 C11 C13 C14 C15 C17 C18 C19 C21 C22 C23 C25 C26 C27 C28 C29 C30 C31 C32 C33 C34 C35 C36 C37 C38 C39 C40 C41 C42 C43 C44 C45 C46 C47 C49 C54 C55 C56 C57 C58 C59 C60 C61 C62 C63 C64 C65 C66 C67 C68 C69 C70 C71 C72: library part CMP-1035-00001-1, "CAP 0.5pF 10V ±0.1pF 0603 (1608 Metric) Thickness 1mm SMD"
C2 C6 C12 C16 C20 C24: library part CMP-1036-00001-1, "CAP 0.5pF 10V ±0.1pF 0805 (2012 Metric) Thickness 0.75mm SMD"
C48: library part "Cap Pol3", "Polarized Capacitor (Surface Mount)"
D1: "1 Amp General Purpose Rectifier"
D3 D4 D5: "Typical RED, GREEN, YELLOW, AMBER GaAs LED"
DACX DACY: "Single 16-Bit Voltage Output nanoDAC with SPI Interface, 2.7 to 5.5 V, -40 to +85 degC, RJ-8, Pb-Free, Reel"
EFM32: "EFM32 Giant Gecko, M3 ARM Cortex CPU, 1024 KB Flash, 128 KB RAM, 1.85 - 3.8 V Supply, 48 MHz Max Speed, -40 to 85 degC, 112-Pin BGA, RoHS Compliant"
FPGA: "Spartan-6 LX 1.2V FPGA, 218 User I/Os, 324-Ball Chip-Scale BGA (0.8mm Pitch), Speed Grade 2, Industrial Grade, Pb-Free"
H1 H4: library part "Header 19X2", "Header, 19-Pin, Dual row"
H2 H5: library part "Header 16X2", "Header, 16-Pin, Dual row"
H3 H6: library part "Header 3X2", "Header, 3-Pin, Dual row"
H10: "Header, 4-Pin, Dual row"
H11: library part "Header 8X2", "Header, 8-Pin, Dual row"
H12 H14 H20 H21: library part "Header 2", "Header, 2-Pin"
H13: library part "Header 2X2", "Header, 2-Pin, Dual row"
H15: library part "Header 4X2", "Header, 4-Pin, Dual row"
H16 H17 H18 H23: library part "Header 3", "Header, 3-Pin"
H19: library part "Header 6X2", "Header, 6-Pin, Dual row"
H24 H25 H34: "Header, 2-Pin, Dual row"
H26 H27 H28 H29 H32 H33: "Header, 2-Pin"
H30: "Header, 3-Pin"
H31: "Header, 5-Pin, Dual row"
JTAG: "Header, 7-Pin, Dual row"
R1 R2 R3 R4 R6 R7 R8 R9 R10 R11: library part CMP-1012-00002-1, "1R 0.1W 5% 0603 (1608 Metric)  SMD"
RES_FPGA RESET_BTN ZOOM_IN ZOOM_OUT: library part switch-button
VREF: "Precision Micropower, Low Dropout Voltage Reference, 5 V Output, 5.1 to 15 V Supply, Industrial, 8-pin SOIC (R-8), Reel"

## Via types
v1: diameter 16, hole 8, Top Layer to Bottom Layer, tented top, 295 vias
v2: diameter 16, hole 8, Top Layer to Bottom Layer, 264 vias
v3: diameter 40, hole 20, Top Layer to Bottom Layer, 75 vias
v4: diameter 60, hole 35, Top Layer to Bottom Layer, 10 vias
v5: diameter 40, hole 25, Top Layer to Bottom Layer, 1 vias

## Nets (pads, with @x,y where several pads share a name; then routed paths per layer and width w, separated by ;. In a path a pad name is that pad's centre, name@x,y a point inside that pad or via, vN(x,y) a via of type N, cw(c..) or ccw(c..) an arc to the next point about the centre after c; other vN are vias at no path point)
1.2V: C1.2 C2.2 C3.2 C4.2 C43.2 C72.2 FPGA.G7 FPGA.H9 FPGA.H11 FPGA.J8 FPGA.J10 FPGA.K9 FPGA.K11 FPGA.L8 FPGA.L10 FPGA.M7 FPGA.M12 VR12.5 | length 4056.7
  Top Layer w5: v1@3078,1988 v1(3078,1989) ; VR12.5@4427.6,3535 VR12.5@4427.6,3543.15
  Top Layer w8: v1(2950.51,2049.49) FPGA.G7@2966.26,2033.74 ; FPGA.M7@2966.26,1876.26 v1(2982.01,1892.01) FPGA.L8@2997.76,1907.76 FPGA.K9@3029.25,1939.25 ; v1(2982.01,1986.5) FPGA.J8@2997.76,1970.75 ; v1(3015.25,2016.25) FPGA.H9@3029.25,2002.24 ; FPGA.L10@3060.75,1907.76 3060.75,1905.25 v1(3073,1893) 3073.27,1892.73 3107.27,1892.73 FPGA.M12@3123.74,1876.26 ; FPGA.J10@3060.75,1970.75 3078,1988 FPGA.H11@3092.24,2002.24 ; FPGA.K11@3092.24,1939.25 v1(3107.99,1923.5)
  Top Layer w20: v3(4210,3534) 4426.6,3534 VR12.5@4427.6,3535 ; VR12.5@4427.6,3543.15 v3(4427.6,3608.6)
  Signal Layer 1 w5: v1(3073,1893) v1@3073,1895
  Signal Layer 1 w8: v1(2950.51,2049.49) 2965,2035 2965,2003 v1@3073,1895 ; v1(2982.01,1892.01) 2990.97,1892.01 3006.9,1907.95 3020.11,1907.95 3035.05,1893 v1(3073,1893) ; v1(2982.01,1986.5) 2985.5,1986.5 v1(3015.25,2016.25) 3042.5,1989 v1(3078,1989)
  Signal Layer 3 w8: v1(3078,1989) 3078,1972 3107.99,1942.01 v1(3107.99,1923.5)
  Bottom Layer w5: C4.2@3040,2349.57 3075,2349.57
  Bottom Layer w8: v1(3073,1893) 3060.56,1905.44 3060.56,2280.68 3090,2310.12 3090,2334.57 3075,2349.57
  Bottom Layer w20: C4.2@3040,2349.57 C3.2@3145,2349.57 3146.06,2348.5 C2.2@3240,2348.5 3251.06,2359.57 C1.2@3335,2359.57 3346.06,2348.5 3430,2348.5 3444,2362.5 3444,2771 3465,2792 3702,2792 4210,3300 v3(4210,3534) ; v3(4427.6,3608.6) 4615,3421.2 C43.2@4615,3415.43 4649.57,3450 C72.2@4649.57,3526
3.3V: "ARM 20.1" "EFM HFOSC.4" "EFM LFOSC.4" "FPGA OSC.4" C5.2 C6.2 C7.2 C8.2 C9.2 C10.2 C11.2 C12.2 C13.2 C14.2 C15.2 C16.2 C17.2 C18.2 C19.2 C20.2 C21.2 C22.2 C23.2 C24.2 C25.2 C26.2 C27.2 C28.2 C29.2 C30.2 C31.2 C32.1 C33.1 C34.1 C35.1 C36.1 C41.2 C46.2 C47.2 C54.2 C56.2 C58.2 C70.2 EFM32.D5 EFM32.D7 EFM32.F8 EFM32.G4 EFM32.G8 EFM32.H7 EFM32.K8 EFM32.K9 EFM32.L4 EFM32.L10 FB.11 FB.33 FLASH1.2 FPGA.B1 FPGA.B5 FPGA.B10 FPGA.B15 FPGA.B17 FPGA.D7 FPGA.D13 FPGA.E2 FPGA.E5 FPGA.E9 FPGA.E10 FPGA.E14 FPGA.E17 FPGA.G4 FPGA.G10 FPGA.G15 FPGA.J2 FPGA.J5 FPGA.J12 FPGA.J14 FPGA.J17 FPGA.K7 FPGA.M4 FPGA.M9 FPGA.M15 FPGA.P5 FPGA.P9 FPGA.P10 FPGA.P14 FPGA.R2 FPGA.R6 FPGA.R12 FPGA.R17 FPGA.U4 FPGA.U9 FPGA.U14 R1.2 R3.2 R6.2 R7.2 R8.2 R9.2 R10.1 R11.2 SRAM1.11 SRAM1.33 VR33.2 VREF.2 | length 8685.7
  Top Layer w5: 1809.75,1985.75 1835,2011 v2(2011,2011) 2076.5,2011 2133.25,1954.25 ; FPGA.P14@3186.73,1813.27 v1(3202.48,1797.52) ; FPGA.B15@3217.78,2191.22 FPGA.B15@3218.23,2191.22 ; 3715,3130.52 3797.42,3130.52 ; 4188.25,1934.25 4201,1921.5 v2(4201,1861) ; v2(4722,1614.44) 4728.44,1608 4746,1608 4782.01,1644.01 EFM32.L4@4782.01,1747.52 ; EFM32.G4@4782.01,1873.5 4797.51,1858 4860.5,1858 EFM32.H7@4876.5,1842.01 v1(4892.24,1826.26) ; FPGA.E9@3029.25,2096.73 3029.25,2097 3029.52,2097 FPGA.E9@3029.25,2096.73
  Top Layer w8: v1(2761.54,2206.97) FPGA.B1@2777.28,2191.22 ; v1(2793.03,1766.02) FPGA.R2@2808.78,1781.77 ; v1(2793.03,1986.5) FPGA.J2@2808.78,1970.75 ; v1(2793.03,2112.48) FPGA.E2@2808.78,2096.73 ; v1(2856.02,1703.03) FPGA.U4@2871.77,1718.78 ; v1(2856.02,1860.51) FPGA.M4@2871.77,1876.26 ; v1(2856.02,2049.49) FPGA.G4@2871.77,2033.74 ; v1(2887.52,1797.52) FPGA.P5@2903.27,1813.27 ; v1(2887.52,1986.5) FPGA.J5@2903.27,1970.75 ; v1(2887.52,2112.48) FPGA.E5@2903.27,2096.73 ; v1(2887.52,2206.97) FPGA.B5@2903.27,2191.22 ; v1(2919.02,1766.02) FPGA.R6@2934.76,1781.77 ; v1(2950.51,1923.5) FPGA.K7@2966.26,1939.25 ; v1(2950.51,2143.98) FPGA.D7@2966.26,2128.23 ; v1(3013.5,1703.03) FPGA.U9@3029.25,1718.78 ; v1(3013.5,1797.52) FPGA.P9@3029.25,1813.27 ; v1(3013.5,1860.51) FPGA.M9@3029.25,1876.26 ; v1(3013.5,2112.48) FPGA.E9@3029.25,2096.73 ; FPGA.P10@3060.75,1813.27 v1(3076.5,1797.52) ; FPGA.G10@3060.75,2033.74 v1(3076.5,2049.49) ; FPGA.E10@3060.75,2096.73 v1(3076.5,2112.48) ; FPGA.B10@3060.75,2191.22 v1(3076.5,2206.97) ; FPGA.R12@3123.74,1781.77 v1(3139.49,1766.02) ; FPGA.J12@3123.74,1970.75 v1(3139.49,1986.5) ; FPGA.D13@3155.24,2128.23 v1(3170.98,2143.98) ; FPGA.U14@3186.73,1718.78 v1(3202.48,1703.03) ; FPGA.J14@3186.73,1970.75 v1(3202.48,1986.5) ; FPGA.E14@3186.73,2096.73 v1(3202.48,2112.48) ; v1(3202,2207) FPGA.B15@3217.78,2191.22 ; v1(3202.49,1892) FPGA.M15@3218.23,1876.26 ; FPGA.G15@3218.23,2033.74 v1(3233.98,2049.49) ; FPGA.R17@3281.22,1781.77 v1(3296.97,1766.02) ; FPGA.J17@3281.22,1970.75 v1(3296.97,1986.5) ; FPGA.E17@3281.22,2096.73 v1(3296.97,2112.48) ; FPGA.B17@3281.22,2191.22 v1(3296.97,2206.97) ; v2(3720,2013) 3767.25,1965.75 SRAM1.11@3798.62,1965.75 ; v1(4797.76,1983.74) EFM32.D5@4813.5,1967.99 ; EFM32.D7@4876.5,1967.99 v1(4892.24,1983.74) ; EFM32.K8@4907.99,1779.02 v1(4923.74,1763.27) ; EFM32.G8@4907.99,1873.5 v1(4923.74,1857.76) ; EFM32.F8@4907.99,1905 v1(4923.74,1889.25) ; EFM32.K9@4939.49,1779.02 v1(4955.24,1763.27) ; EFM32.L10@4970.98,1747.52 v1(4986.73,1731.77)
  Top Layer w20: VREF.2@415,2244.49 v3(415,2431) ; R7.2@660.43,375 v3(720,375) ; FB.11@1738.62,1985.75 1809.75,1985.75 ; v3(1757.43,378.43) R6.2@1757.43,434 ; 2133.25,1954.25 FB.33@2191.38,1954.25 ; 4188.25,1934.25 SRAM1.33@4251.38,1934.25 ; v3(4320,915) FLASH1.2@4410.94,915 ; v3(4555,3039) 4555,3113.09 4557.42,3115.52 ; v3(5110.03,3054.97) 5172.42,3054.97
  Top Layer w35: VR33.2@3570,3401.97 v4(3570,3267) 3570,3155 3594.48,3130.52 3797.42,3130.52
  Bottom Layer w5: R1.2@2440.43,1490 2615,1664.57 v2(2615,1714) ; C9.2@2584.57,2160 C8.2@2584.57,2255 ; C7.2@2755,2334.57 2800,2379.57 ; v2(3002,358) 3002,255 3057,200 ; C22.2@3429.57,1660 C23.2@3429.57,1755 C24.2@3429.57,1840.57 ; C30.2@4494.57,1700 4494.57,1749.57 ; 5195.43,1659.57 5195.43,1678.57
  Bottom Layer w8: R8.2@3429.44,2052 3429.44,2022.35 3439.44,2012.35 v2(3439.44,1992.35) ; R9.2@3499.57,2395 3513,2395 3545,2427 3642,2427 3687.44,2381.56 v2(3714.34,2381.56) v2@3714.34,2381.66
  Bottom Layer w20: C47.2@670,2110.43 746.43,2110.43 772.57,2110.43 v3(799,2084) ; C46.2@675,2395.43 v3(750.57,2395.43) ; R1.2@2440.43,1490 2521,1490 2650.43,1619.43 C14.2@2650.43,1700 C13.2@2650.43,1790 2651.5,1791.06 C12.2@2651.5,1885 2655.43,1888.94 C11.2@2655.43,1980 C10.2@2655.43,2070 2703,2070 v3(2704,2069) ; C9.2@2584.57,2160 C8.2@2584.57,2255 2584.57,2321.43 v3(2584.57,2369.57) ; v3(2716,2445) 2718,2445 2727.5,2454.5 2792,2454.5 C6.2@2845,2401.5 ; C15.2@2745,1570.43 2746.06,1571.5 C16.2@2840,1571.5 2841.06,1570.43 C17.2@2930,1570.43 C18.2@3030,1570.43 ; C7.2@2755,2334.57 2821.93,2401.5 C6.2@2845,2401.5 ; C5.2@2940,2344.57 2919.43,2344.57 2862.5,2401.5 C6.2@2845,2401.5 ; 2980,1570.43 2980,1537 v3(2982,1535) ; R3.2@2980.43,200 3057,200 ; C18.2@3015.43,1570.43 C18.2@3030,1570.43 ; C21.2@3320,1570.43 3313.94,1576.5 C20.2@3225,1576.5 3218.94,1570.43 C19.2@3135,1570.43 C18.2@3030,1570.43 ; v3(3383,1838) 3395,1850 C24.2@3428.5,1850 ; C22.2@3429.57,1660 C23.2@3429.57,1755 3428.5,1756.06 C24.2@3428.5,1850 ; C25.2@3429.57,1940 3428.5,1938.94 C24.2@3428.5,1850 ; v3(3668,3315) 3668,3273.57 C70.2@3693.57,3248 ; C58.2@3672.42,2995.6 v3(3718.83,3042) ; v3(4389.42,1888.15) 4391.27,1890 C28.2@4489.57,1890 ; C26.2@4489.57,2080 C27.2@4489.57,1985 C28.2@4489.57,1890 ; C30.2@4494.57,1700 4489.57,1705 C29.2@4489.57,1795 C28.2@4489.57,1890 ; C31.2@4670,1564.57 4675,1569.57 C32.1@4770,1569.57 C33.1@4870,1569.57 ; v3(4870,1450) C33.1@4870,1569.57 ; C56.2@4892.42,3020.6 v3(4892.42,3076.42) ; C54.2@5022.42,2939.73 5059.73,2939.73 v3(5073.73,2939.73) ; C35.1@5055,1564.57 5050,1569.57 C34.1@4960,1569.57 C33.1@4870,1569.57 ; C36.1@5195.43,1730 5195.43,1659.57 v3(5224,1631) ; R11.2@5419,1714.56 5421,1716.56 v3(5421,1766) 5421,1812.44 R10.1@5426,1817.44
  Bottom Layer w35: v4(3570,3267) 3570,3355 3645.43,3430.43 C41.2@3765,3430.43
5V: H16.1 PSU.1 | length 1633.4
  Top Layer w25: PSU.1@4063.18,3761 4068,3756.18 4068,3711 4078,3701
  Top Layer w30: 4078,3701 4179,3701
  Top Layer w35: 4179,3701 4332,3854 5456,3854 H16.1@5545,3765
A5V: C44.1 C45.1 C60.2 C61.2 C62.1 C63.1 C66.2 C68.2 DACX.2 DACY.2 R2.2 VREG5.5 | length 1610.8
  Top Layer w8: DACX.2@225.28,2697.2 290.2,2697.2 307,2714 307,2782 307,2908 v2(304,2911) ; DACY.2@890.28,2697.2 961.2,2697.2 994,2730 994,2789 937,2846 v2(937,2878)
  Top Layer w20: v3(1029,3274) 1077,3274 1109.6,3241.4 VREG5.5@1109.6,3216.13
  Bottom Layer w20: R2.2@122,3768.43 v3(201.43,3768.43) ; C44.1@387,2771.43 443.43,2771.43 520,2771.43 ; v3(520,2835) 520,2771.43 ; C45.1@597,2771.43 536.57,2771.43 520,2771.43 ; C66.2@891.57,3163 v3(891.57,3225.57) ; C60.2@1049,2772.43 C61.2@1160,2772.43 ; v3(1160,2827) C61.2@1160,2772.43 ; v3(1224,2969) 1285.57,3030.57 C68.2@1285.57,3076 ; C63.1@1362,2772.43 C61.2@1160,2772.43
AGND: BNCX.1 BNCY.1 C64.1 C65.1 C66.1 C67.1 C68.1 D1.1 D4.2 DACX.5 DACY.5 H24.1 H25.1 H29.2 VREG5.2 | length 877
  Top Layer w8: v2(61,2816) 128.61,2748.39 DACX.5@134.72,2748.39 ; v2(723,2877) 723,2793 767.61,2748.39 DACY.5@799.72,2748.39
  Top Layer w20: v3(98,3288) D4.2@98,3398.1
  Top Layer w25: v3(1095,3042) 1123,3042 1147,3066 VREG5.2@1147,3107.87
  Bottom Layer w20: C66.1@962.43,3163 v3(962.43,3220.43) ; C65.1@1184.43,3315 1224,3315 v3(1253,3344) ; C64.1@1347.43,3196 1347.43,3208.43 v3(1405,3266) ; C68.1@1356.43,3076 1399,3076 v3(1419,3056)
  Bottom Layer w25: v3(961.43,2961.57) C67.1@961.43,3041
CLK: DACX.8 DACY.8 H15.6 | length 1541.8
  Top Layer w5: DACX.8@134.72,2671.61 155,2671.61 v2(171.61,2655) ; DACY.8@799.72,2671.61 842.61,2671.61 v2(843,2672)
  Signal Layer 2 w5: v2(843,2672) 843,2322 H15.6@1135,2030
  Signal Layer 3 w5: v2(171.61,2655) 204.61,2688 643,2688 659,2672 v2(843,2672)
DATA_X: DACX.1 H15.2 | length 1258.3
  Top Layer w5: DACX.1@225.28,2671.61 v2(271,2671.61)
  Signal Layer 2 w5: v2(271,2671.61) 293.39,2671.61 H15.2@1135,1830
DATA_Y: DACY.1 H15.4 | length 862.2
  Top Layer w5: DACY.1@890.28,2671.61 923,2671.61 1000,2594.61 1000,2065 H15.4@1135,1930
EBI.A0: EFM32.J4 FPGA.F15 H4.1 | length 3925.4
  Top Layer w5: FPGA.F15@3218.23,2065.24 v1(3234,2081) ; v1(4766.26,1794.76) EFM32.J4@4782.01,1810.51
  Signal Layer 1 w5: v1(3234,2081) 3218.23,2065.24 3218.23,1655.2 3257.43,1616 3537,1616 3567,1586 4704.56,1586 4730,1560.56 4745.56,1560.56 v2(4790,1605)
  Signal Layer 2 w5: v1(4766.26,1794.76) 4750.51,1779.02 4750.51,1713.66 4771.17,1693 4805,1693 4818,1680 4818,1633 v2(4790,1605)
  Signal Layer 4 w5: H4.1@1895.08,2623.03 2092.11,2426 2394,2426 2722,2098 3217,2098 v1(3234,2081)
EBI.A1: EFM32.K3 FPGA.F16 H4.3 | length 3466.5
  Top Layer w5: v1(3265,2081) 3265,2080.51 FPGA.F16@3249.72,2065.24 v1@3265.47,2080.98 ; v1(4734.76,1763.27) EFM32.K3@4750.51,1779.02
  Signal Layer 1 w5: v1@3265.47,2080.98 3281.22,2065.24 3344.76,2065.24 3366.25,2043.75 3394.97,2043.75 3423.7,2072.48 3632.54,2072.48 3675.17,2115.11 3747.5,2115.11 3764.61,2098 4282.33,2098 4302.45,2077.88 4371.25,2077.88 4371.56,2077.56 4433.69,2077.56 4440.56,2084.44 4496.74,2084.44 4512.41,2068.77 4603.23,2068.77 4644,2028 4644,1927.56 4717.44,1927.56 4750,1895 4750,1835 4719.02,1804.02 4719.02,1779.02 v1(4734.76,1763.27)
  Signal Layer 4 w5: H4.3@1995.08,2623.03 2050.11,2568 2664.52,2568 2761.26,2471.26 2777.74,2471.26 3026,2223 3241,2223 3249,2215 3249,2097 v1(3265,2081)
EBI.A2: EFM32.L3 FPGA.C17 H4.5 | length 3634
  Top Layer w5: FPGA.C17@3281.22,2159.72 v1(3296.97,2175.47) v1@3297.25,2175.75 ; v1@4734.76,1727.53 v1@4735,1727.76 ; v1(4734.76,1731.77) EFM32.L3@4750.51,1747.52
  Signal Layer 1 w5: v1(3296.97,2175.47) 3312.72,2191.22 3337.01,2191.22 3340.58,2187.65 3352.54,2187.65 3361,2196.1 3361,2204.58 3378.44,2222.02 3378.44,2233.98 3363.42,2249 v2(3362,2249)
  Signal Layer 2 w5: v1@3297.25,2175.75 3314,2159 3414,2159 3438.56,2134.44 3438.56,2122.99 3447.02,2114.54 3458.46,2114.54 3603,1970 3603,1595 3623,1575 4582.24,1575 v1@4735,1727.76
  Signal Layer 4 w5: H4.5@2095.08,2623.03 2131.05,2659 2521,2659 2545,2635 2545,2605 2562.93,2587.07 2687.61,2587.07 2782.34,2492.34 2806.66,2492.34 3013.44,2285.56 3323.44,2285.56 3360,2249 v2(3362,2249)
EBI.A3: EFM32.J7 FPGA.C18 H4.7 | length 3878.8
  Top Layer w5: FPGA.C18@3312.72,2159.72 v1@3328.46,2175.47 ; v1(3328.99,2176) v1@3328.46,2175.47 ; v2(3346.56,2202.08) 3346.56,2205.23 3355,2213.67 3355,2185.67 3344.8,2175.47 v1@3328.46,2175.47 ; EFM32.J7@4876.5,1810.51 v1(4892.24,1794.76)
  Signal Layer 1 w5: v2(3621,1643) 3981.96,1643 4001.62,1662.67 4048.38,1662.67 4062.67,1648.38 4995,1648.38 5017,1670.38 5017,1695 5005,1707 4988.64,1707 4971,1724.64 4951.08,1704.72 4885.43,1704.72 4876.5,1713.66 4876.5,1779.02 v1(4892.24,1794.76)
  Signal Layer 2 w5: v1(3328.99,2176) 3432,2176 3621,1987 v2(3621,1643)
  Signal Layer 4 w5: H4.7@2195.08,2623.03 2239.98,2578.13 2675.77,2578.13 2771.95,2481.95 2789.05,2481.95 2995.44,2275.56 3313.05,2275.56 3346.56,2242.05 v2(3346.56,2202.08)
EBI.A4: EFM32.J8 FPGA.F14 H4.9 | length 3572.1
  Top Layer w5: FPGA.F14@3186.73,2065.24 v1(3203.25,2081.75) ; EFM32.J8@4907.99,1810.51 v1(4923.74,1794.76)
  Signal Layer 1 w5: v2(2397,2286) 2401.71,2290.71 2912.91,2290.71 2921.57,2282.06 3159.47,2282.06 3186.73,2254.8 3186.73,2096.73 v1@3202.48,2080.98 ; 4907.99,1713.66 4907.99,1779.02 v1(4923.74,1794.76) ; 4907.99,1716.99 4921,1730 v1(4924,1730)
  Signal Layer 2 w5: H4.9@2295.08,2623.03 2295.08,2387.92 v2(2397,2286)
  Signal Layer 4 w5: v1(3203.25,2081.75) 3220,2065 3272,2065 3282,2075 3282,2151 3290,2159 3402,2159 3737,1824 3964,1824 4130,1658 4323,1658 4371,1706 4678.58,1706 4682.02,1702.56 4896.56,1702.56 v1(4924,1730)
EBI.A5: EFM32.G10 FPGA.G14 H4.11 | length 4068.4
  Top Layer w5: v1(3140,2080) 3141.71,2078.29 3141.71,2059.63 3149.63,2051.71 3168.76,2051.71 FPGA.G14@3186.73,2033.74 FPGA.G14@3186.73,2038 ; EFM32.G10@4970.98,1873.5 v1(4986.73,1857.76)
  Signal Layer 1 w5: v2(3980,1618) 4007.42,1618 4010.56,1614.85 4036.29,1614.85 4039.44,1618 4581,1618 4599,1600 4758,1600 4778,1620 5035,1620 5057,1642 5057,1821.35 5036.34,1842.01 5002.48,1842.01 v1(4986.73,1857.76)
  Signal Layer 2 w5: H4.11@2395.08,2623.03 2448.11,2570 2609,2570 2634,2595 2634,2719 2674,2759 2727,2759 2732,2754 2732,2600 2803.5,2528.5 3079.5,2528.5 3181.5,2426.5 3181.5,2300.89 3125.05,2244.44 3125.05,2094.95 v1(3140,2080)
  Signal Layer 4 w5: v1(3140,2080) 3174,2046 3208,2046 3219,2035 3466.36,2035 3670.23,1831.13 3672.32,1831.13 3693.39,1810.06 3693.39,1807.97 3883.36,1618 v2(3980,1618)
EBI.A6: EFM32.G11 FPGA.D17 H4.13 | length 3416.2
  Top Layer w5: H4.13@2495.08,2623.03 v2(2646.11,2472) ; FPGA.D17@3281.22,2131 FPGA.D17@3281.22,2128.23 v1@3296.97,2143.98 ; v1@3293.53,2140.53 3297.34,2143.49 v1(3298,2144) ; EFM32.G11@5002.48,1873.5 v1(5018.23,1857.76) 5036.34,1857.76 5044.58,1866 v2(5049,1866)
  Signal Layer 1 w5: v2(2646.11,2472) 2970,2472 3105,2337 3168.23,2337 3238.61,2266.62 3261.38,2266.62 3280,2248 3280,2165 3298,2147 v1(3298,2144)
  Signal Layer 4 w5: v1(3298,2144) 3299,2145 3312,2135 3312,2105 3319,2098 3372.59,2098 3379.56,2104.97 3409.44,2104.97 3418.44,2095.98 3418.44,2095.56 3673.94,1840.06 3676.02,1840.06 3702.32,1813.76 3702.32,1811.68 3745,1769 3863,1769 3986,1646 5075,1646 5098,1669 5098,1850 5082,1866 v2(5049,1866)
EBI.A7: EFM32.E9 FPGA.D18 H4.15 | length 4003.6
  Top Layer w5: FPGA.D18@3312.72,2128.23 v1@3328.74,2144.26 ; EFM32.E9@4939.49,1936.5 v1(4955.24,1952.24)
  Signal Layer 1 w5: v2(3614,2346) 3636,2324 4261.09,2324 4342.53,2242.56 5065.44,2242.56 5095,2213 5095,1995.16 5036.34,1936.5 4970.98,1936.5 v1(4955.24,1952.24)
  Signal Layer 4 w5: H4.15@2595.08,2623.03 2559,2659.11 2559,2775 2582,2798 2922,2798 2945,2775 2945,2568 2975,2538 3305,2538 3512,2331 3579,2331 v2(3614,2366)
  Bottom Layer w5: v1@3328.74,2144.26 v1(3329.02,2143.98) 3355,2118 3386.42,2118 3392.42,2124 3437.56,2124 3447.02,2114.54 3461.54,2114.54 3506.44,2159.44 3506.44,2203.44 3555,2252 3570,2252 3614,2296 v2(3614,2346) v2(3614,2366)
EBI.A8: EFM32.E10 FPGA.H12 H4.17 | length 3621.8
  Top Layer w5: FPGA.H12@3123.74,2002.24 v1(3139.49,2017.99) v1@3140.25,2018.75 ; EFM32.E10@4970.98,1936.5 v1(4986.73,1952.24)
  Signal Layer 1 w5: v2(3494,2327) 3575,2327 3595,2307 3595,2291 3633.97,2252.03 4260.47,2252.03 4287.5,2225 5049,2225 5076,2198 5076,2007.65 5036.34,1967.99 5002.48,1967.99 v1(4986.73,1952.24)
  Signal Layer 2 w5: H4.17@2695.08,2623.03 2695.08,2590.03 2793.11,2492 3043,2492 3163,2372 3163,2313.89 3093.56,2244.44 3093.56,2063.93 v1(3139.49,2017.99)
  Bottom Layer w5: v1@3140.25,2018.75 3125,2034 3125,2245.44 3137,2257.44 3328.38,2257.44 3397.94,2327 v2(3494,2327)
EBI.A9: EFM32.F10 FPGA.G13 H4.19 | length 4778.1
  Top Layer w5: H4.19@2795.08,2623.03 2795.08,2533.95 2785.56,2524.44 2785.56,2347.44 v2(2805,2328) ; v2(3096,2836) 3166.56,2765.44 3722.56,2765.44 3755,2733 v2(3755,2506) ; v1(3109,2081) 3107,2079 3107,2062.85 3118.14,2051.71 3135.29,2051.71 3153.26,2033.74 FPGA.G13@3155.24,2033.74 ; EFM32.F10@4970.98,1905 v1(4986.73,1889.25)
  Signal Layer 1 w5: v2(3073.38,1593.62) 3119.62,1593.62 3155.24,1629.24 3155.24,2033.74 3109,2079.98 v1(3109,2081)
  Signal Layer 2 w5: v2(2805,2328) 2934,2328 2967,2295 2967,1980 2974.94,1972.06 3015,1972.06 3035,1952.06 3035,1632 v2(3073.38,1593.62) ; v2(3755,2506) 3756,2506 v2(3958,2304)
  Signal Layer 4 w5: v2(3958,2304) 4345,1917 4413.58,1917 4415.99,1914.59 4427.95,1914.59 4430.36,1917 4763,1917 4776.31,1903.69 4961.22,1903.69 4975.65,1889.25 v1(4986.73,1889.25)
  Bottom Layer w5: H4.19@2795.08,2623.03 2842,2669.95 2842,2756 2922,2836 v2(3096,2836)
EBI.A10: EFM32.E11 FPGA.E16 H4.21 | length 3281.8
  Top Layer w5: FPGA.E16@3249.72,2096.73 v1(3264.99,2112) ; EFM32.E11@5002.48,1936.5 v1(5018.23,1952.24) 5036.34,1952.24 5083.42,1905.16 v2(5083.42,1842)
  Signal Layer 1 w5: H4.21@2895.08,2623.03 3153.11,2365 3267.62,2365 3387.37,2245.25 3387.37,2218.32 3376,2206.94 3376,2159.43 3344.8,2128.23 3281.22,2128.23 v1@3265.47,2112.48
  Signal Layer 3 w5: v1(3264.99,2112) 3265.47,2112.48 3280.99,2128 3349,2128 3470.68,2249.68 3470.68,2344.02 3522.66,2396 v2(3824,2396)
  Signal Layer 4 w5: v2(3824,2396) 3842.57,2396 4378.13,1860.44 4636.44,1860.44 4654.88,1842 v2(5083.42,1842)